# Altium PCB CPLD-V.PcbDoc (part 1 of 2)
Units mm, origin at the board's own origin, x right, y up, seen from the top; angles counter-clockwise.
Board outline 69.85 x 107.95 mm, 4 copper layers (Top Layer, Layer 1, Layer 2, Bottom Layer), stack 1.803 mm thick; 157 components, 164 nets, 714 pads, 232 vias.
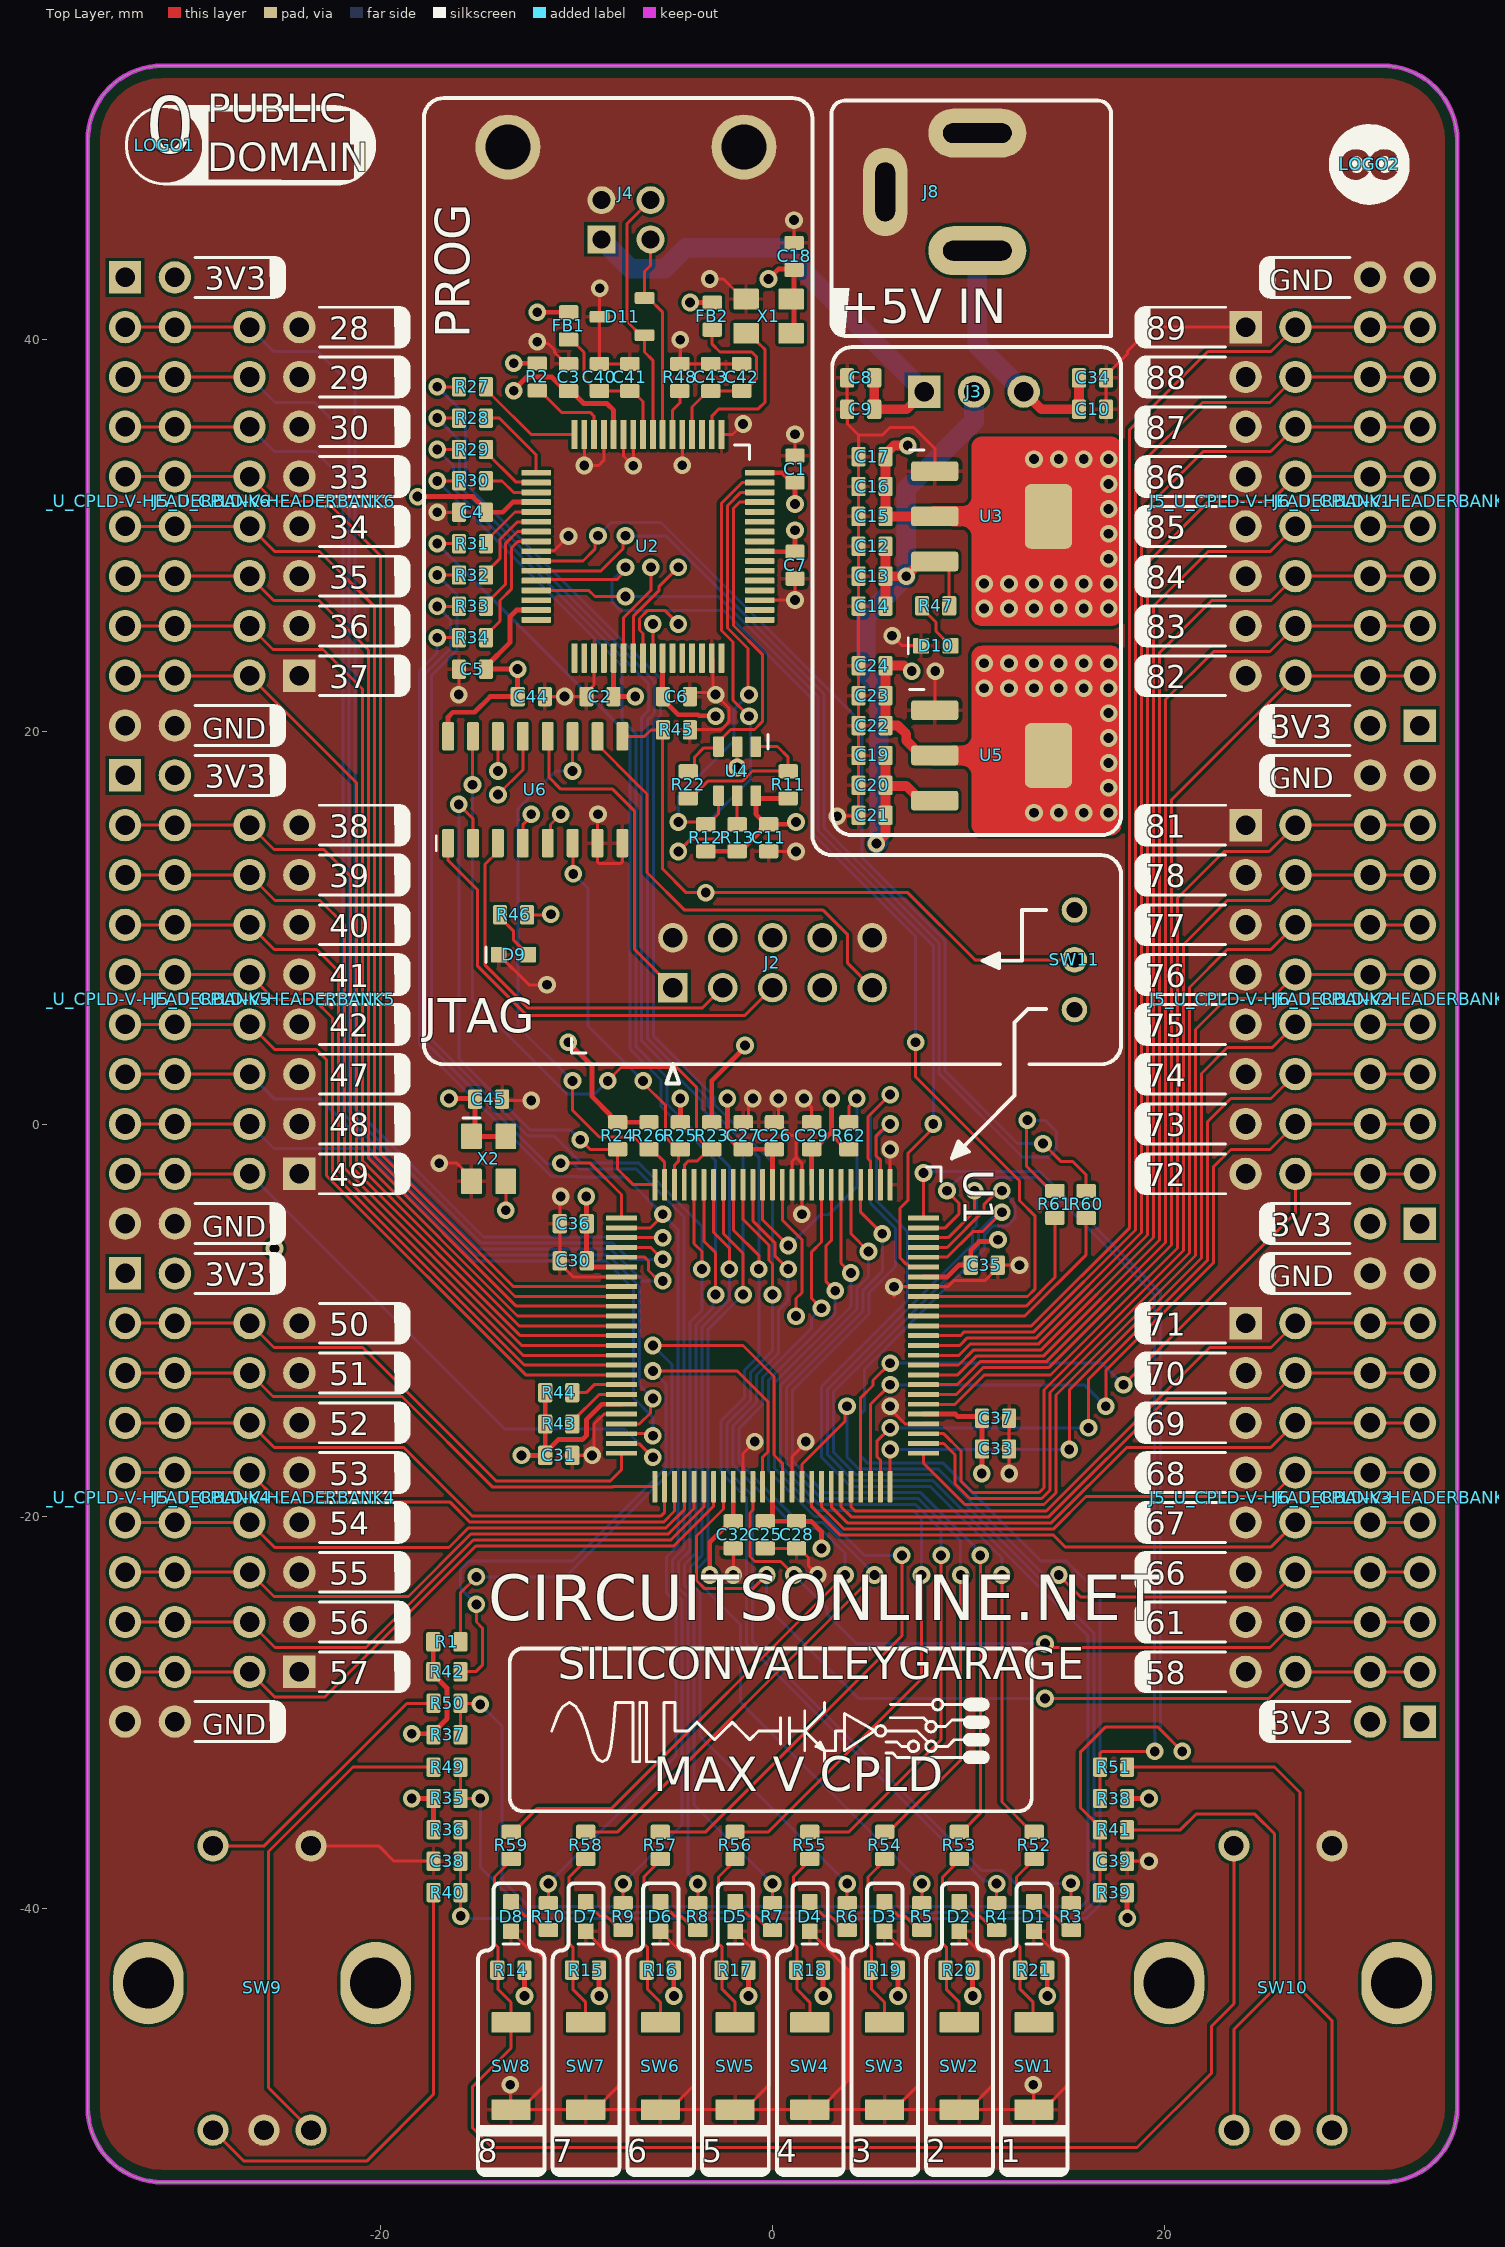
[diagram p0: Top Layer view]
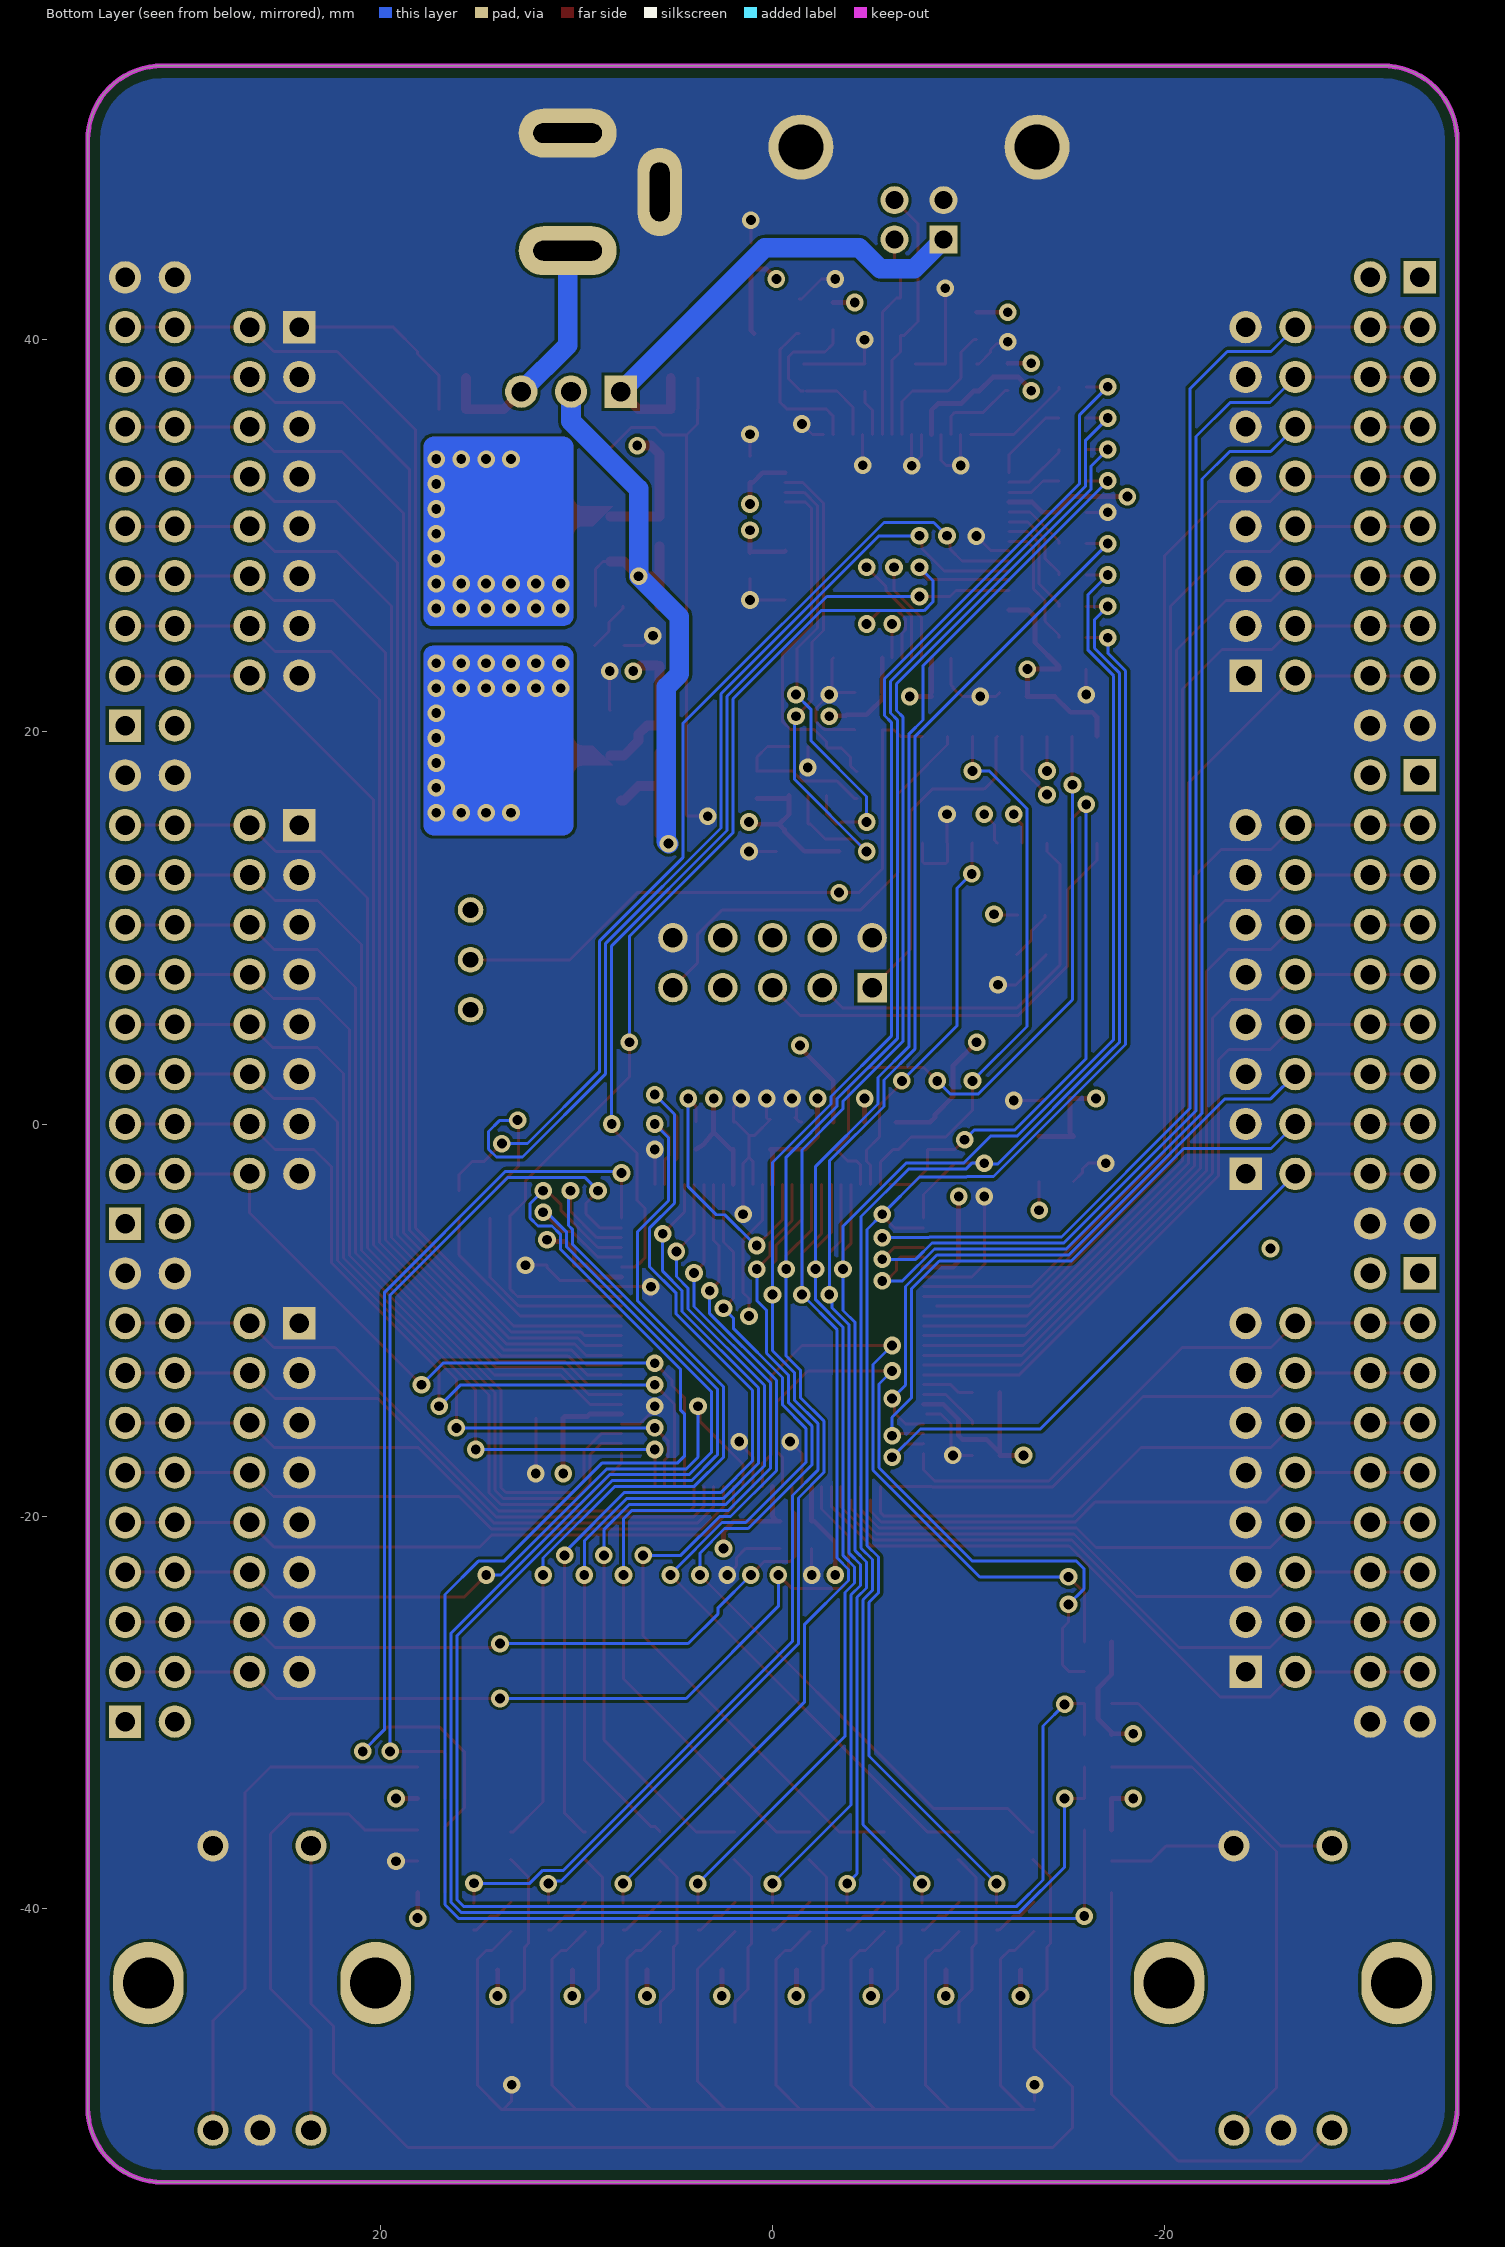
[diagram p1: Bottom Layer view, seen from below]
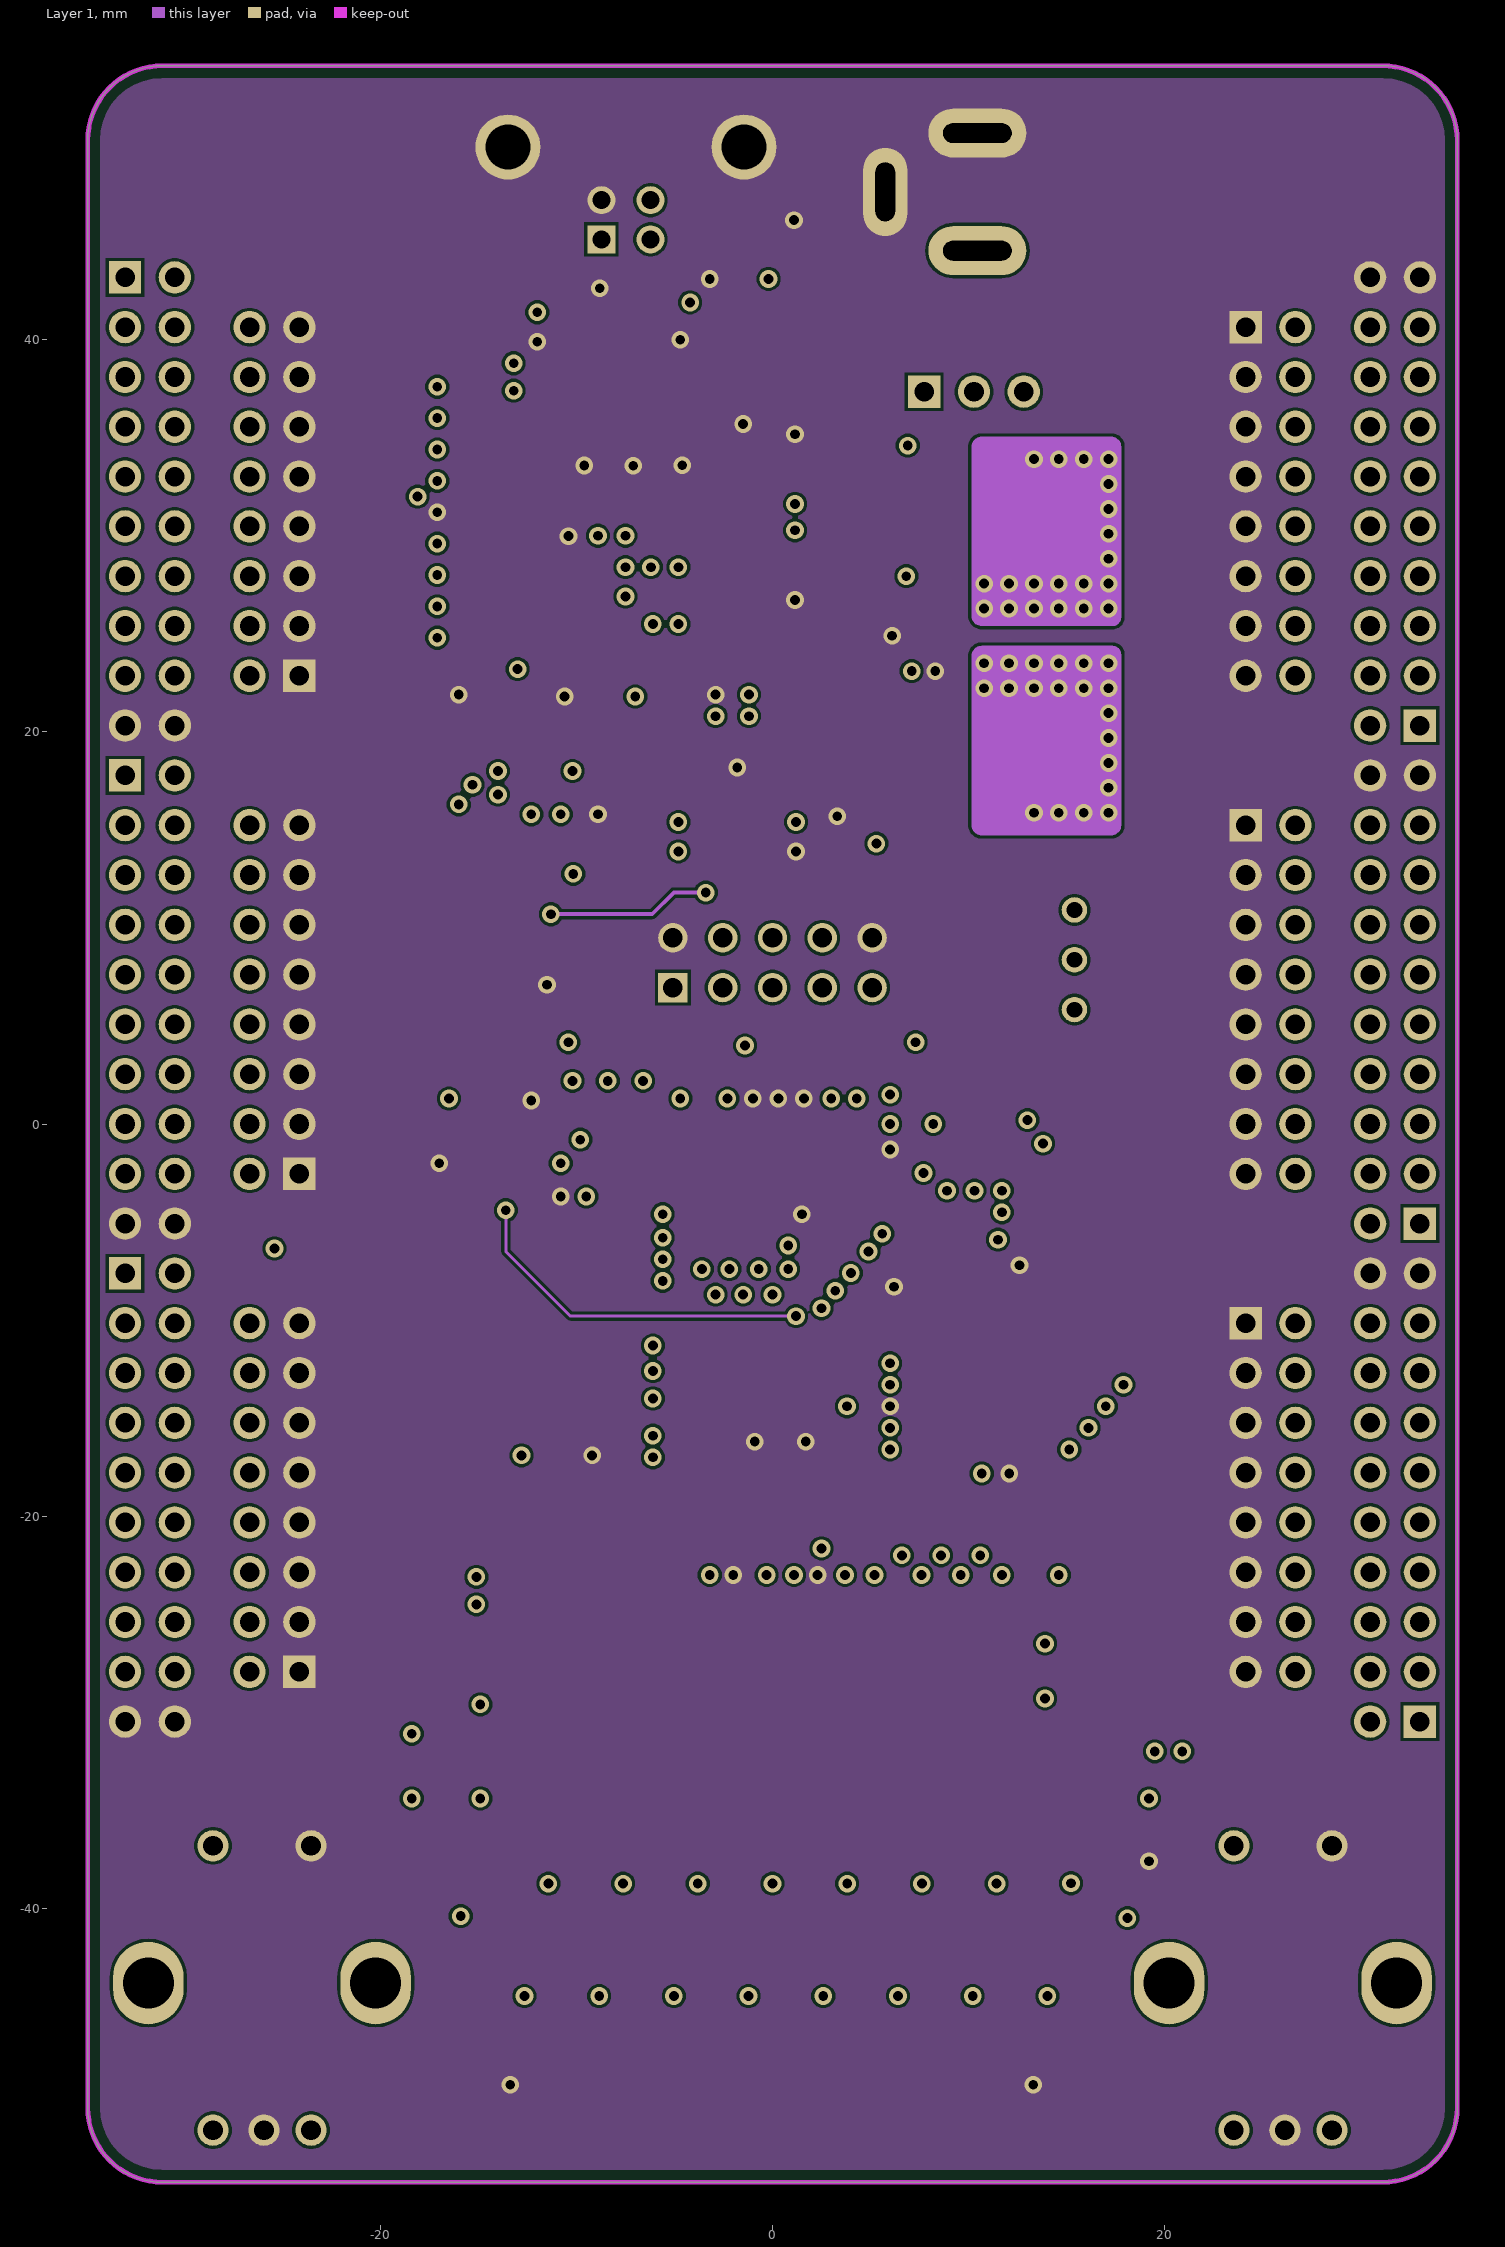
[diagram p2: Layer 1]
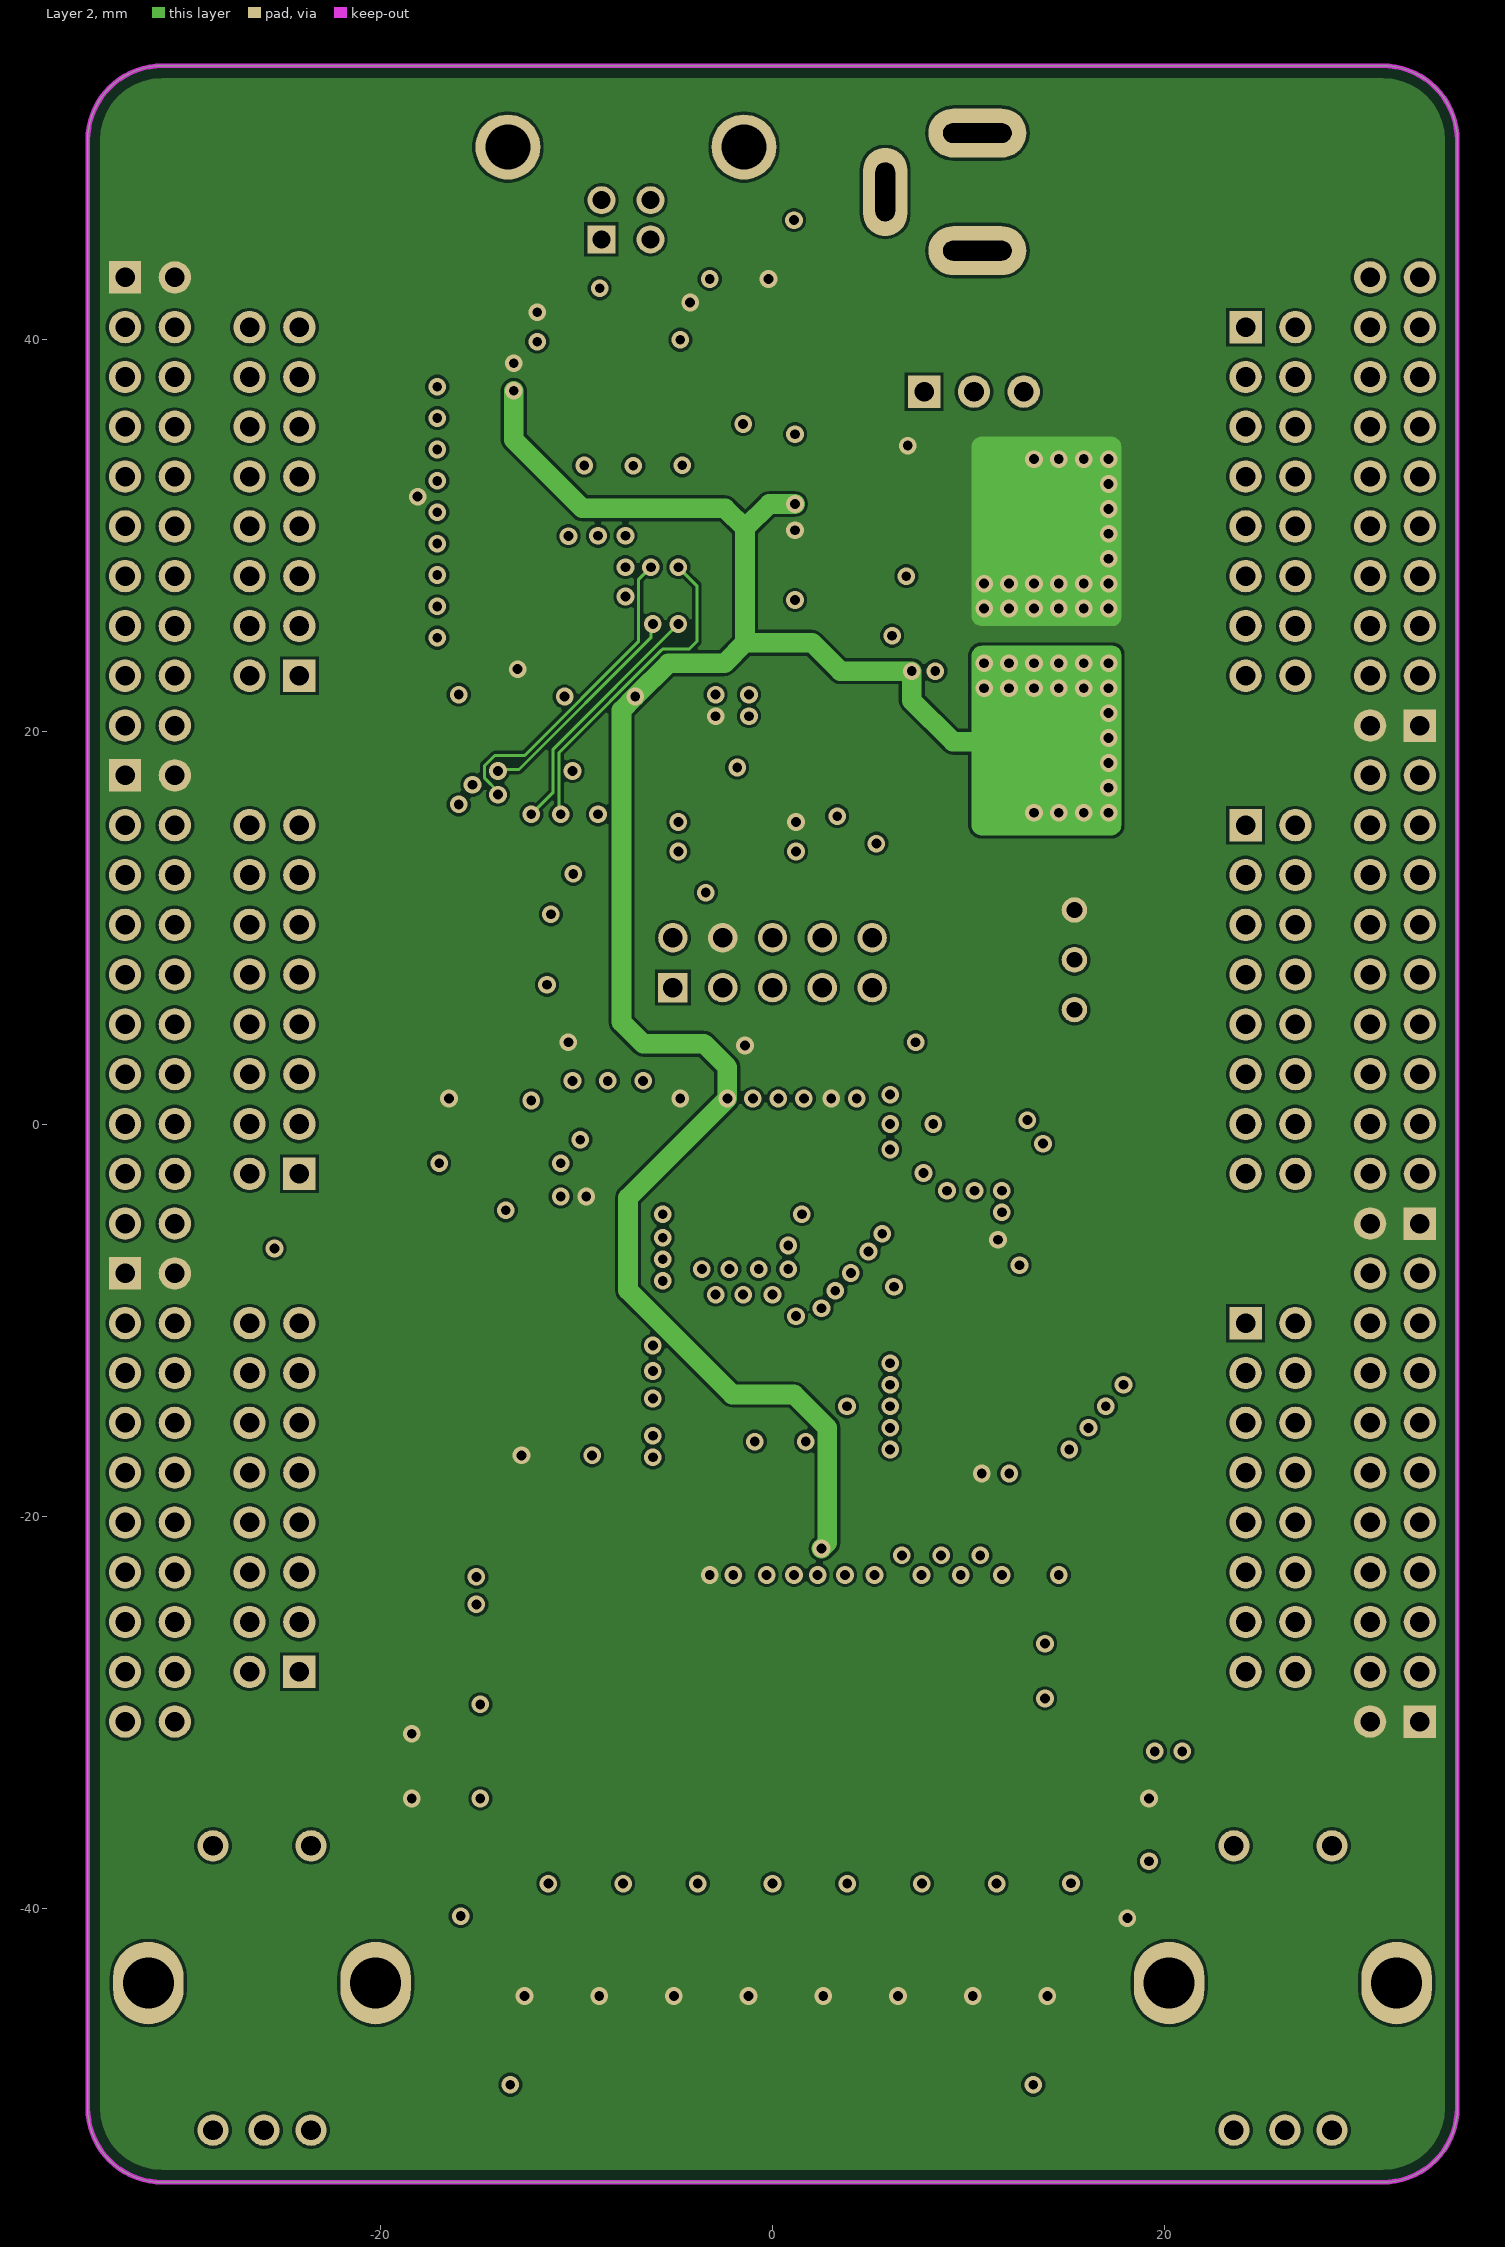
[diagram p3: Layer 2]
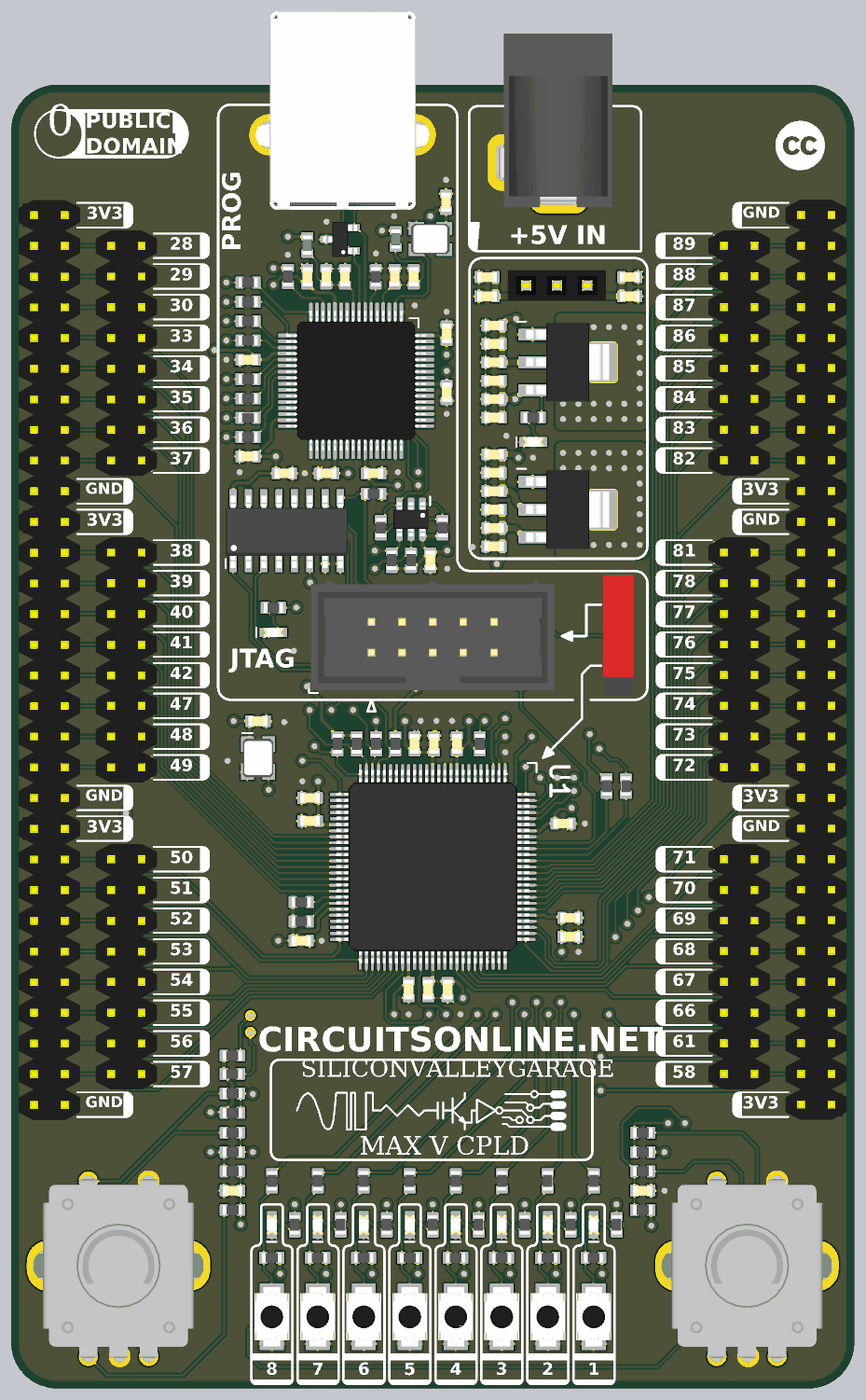
[diagram p5: 3D render of the assembled board from above, using the file's embedded part models]

## Layer stack, top to bottom
Top Solder: solder mask 0.0102, Solder Resist, Dk 3.5
Top Layer: signal copper 0.0356
Dielectric 2: prepreg 0.0711, PP-006, Dk 4.1
Layer 1: signal copper 0.035
Dielectric 1: dielectric 1.52, FR-4, Dk 4.8
Layer 2: signal copper 0.035
Dielectric 3: prepreg 0.0711, PP-006, Dk 4.1
Bottom Layer: signal copper 0.0356
Bottom Solder: solder mask 0.0102, Solder Resist, Dk 3.5

## Board outline
-34.925,-50.165 ccw(c-31.115,-50.165) -31.115,-53.975 31.115,-53.975 ccw(c31.115,-50.165) 34.925,-50.165 34.925,50.165 ccw(c31.115,50.165) 31.115,53.975 -31.115,53.975 ccw(c-31.115,50.165) -34.925,50.165

## Design rules (kind name [scope] priority, off if disabled: settings)
BoardOutlineClearance [All] p1 off: gap=0.5 ignorepadtopadclearanceinfootprint=FALSE
Clearance Clearance_1 [InPolygon vs IsKeepOut] p1: gap=0.5 ignorepadtopadclearanceinfootprint=FALSE
Clearance [All] p2: gap=0.152 ignorepadtopadclearanceinfootprint=FALSE
HoleSize [All] p1: absolutevalues=TRUE maxlimit=10 minlimit=0.025 maxpercent=80.000 minpercent=20.000
MinimumSolderMaskSliver [All] p1: minsoldermaskwidth=0.098
PolygonConnect [All] p1: thpad.connectstyle=Direct thpad.reliefconductorwidth=0.254 thpad.reliefentries=4 thpad.polygonreliefangle="90 Angle" thpad.airgapwidth=0.254 smdpad.connectstyle=Relief smdpad.reliefconductorwidth=0.2 smdpad.reliefentries=4 smdpad.polygonreliefangle="90 Angle" smdpad.airgapwidth=0.2 via.connectstyle=Direct via.reliefconductorwidth=0.254 via.reliefentries=4 via.polygonreliefangle="90 Angle" via.airgapwidth=0.254
RoomDefinition U_CPLD-V-HEADERBANK6 [InComponentClass('U_CPLD-V-HEADERBANK6')] p1: confinementstyle=ConfineIn formatcopy=TRUE lockcomponents=FALSE outline -266.061,-132.842 -215.261,-132.842 -215.261,-107.442 -266.061,-107.442
RoomDefinition U_CPLD-V-HEADERBANK5 [InComponentClass('U_CPLD-V-HEADERBANK5')] p2: confinementstyle=ConfineIn formatcopy=TRUE lockcomponents=FALSE outline -266.061,-132.842 -215.261,-132.842 -215.261,-107.442 -266.061,-107.442
RoomDefinition U_CPLD-V-HEADERBANK4 [InComponentClass('U_CPLD-V-HEADERBANK4')] p3: confinementstyle=ConfineIn formatcopy=TRUE lockcomponents=FALSE outline -266.061,-132.842 -215.261,-132.842 -215.261,-107.442 -266.061,-107.442
RoomDefinition U_CPLD-V-HEADERBANK3 [InComponentClass('U_CPLD-V-HEADERBANK3')] p4: confinementstyle=ConfineIn formatcopy=TRUE lockcomponents=FALSE outline -266.061,-132.842 -215.261,-132.842 -215.261,-107.442 -266.061,-107.442
RoomDefinition U_CPLD-V-HEADERBANK2 [InComponentClass('U_CPLD-V-HEADERBANK2')] p5: confinementstyle=ConfineIn formatcopy=TRUE lockcomponents=FALSE outline -266.061,-132.842 -215.261,-132.842 -215.261,-107.442 -266.061,-107.442
RoomDefinition U_CPLD-V-HEADERBANK1 [InComponentClass('U_CPLD-V-HEADERBANK1')] p6: confinementstyle=ConfineIn formatcopy=TRUE lockcomponents=FALSE outline -266.061,-132.842 -215.261,-132.842 -215.261,-107.442 -266.061,-107.442
RoutingVias [All] p1: holewidth=0.5 width=0.9 viastyle="Through Hole" minholewidth=0.25 minwidth=0.45 maxholewidth=0.6 maxwidth=1
SilkToSilkClearance [All] p1 off: silktosilkclearance=0.15
SilkToSolderMaskClearance [IsPad] p1: minsilkscreentomaskgap=0.05 clearancetoexposedcopper=TRUE
SolderMaskExpansion [All] p1: expansion=0.102 istentingtop=FALSE
SupplyNets "Schematic Supply Nets_5" [InNet('P1V8D')] p1: voltage=0.000
SupplyNets "Schematic Supply Nets_2" [InNet('P3V3D')] p2: voltage=0.000
SupplyNets "Schematic Supply Nets" [InNet('GND')] p3: voltage=0.000
Width [All] p1: maxlimit=2.54 minlimit=0.152 preferedwidth=0.203
26 further rules are at their usual default settings.

## Classes and differential pairs
channel class CPLD-V-HEADERBANK: U_CPLD-V-HEADERBANK1 U_CPLD-V-HEADERBANK2 U_CPLD-V-HEADERBANK3 U_CPLD-V-HEADERBANK4 U_CPLD-V-HEADERBANK5 U_CPLD-V-HEADERBANK6
component class U_CPLD-V-HEADERBANK6: J5_U_CPLD-V-HEADERBANK6 J6_U_CPLD-V-HEADERBANK6
component class U_CPLD-V-HEADERBANK5: J5_U_CPLD-V-HEADERBANK5 J6_U_CPLD-V-HEADERBANK5
component class U_CPLD-V-HEADERBANK4: J5_U_CPLD-V-HEADERBANK4 J6_U_CPLD-V-HEADERBANK4
component class U_CPLD-V-HEADERBANK3: J5_U_CPLD-V-HEADERBANK3 J6_U_CPLD-V-HEADERBANK3
component class U_CPLD-V-HEADERBANK2: J5_U_CPLD-V-HEADERBANK2 J6_U_CPLD-V-HEADERBANK2
component class U_CPLD-V-HEADERBANK1: J5_U_CPLD-V-HEADERBANK1 J6_U_CPLD-V-HEADERBANK1
component class "CPLD-V MAIN": C1 C2 C3 C4 C5 C6 C7 C8 C9 C10 C11 C12 C13 C14 C15 C16 C17 C18 C19 C20 C21 C22 C23 C24 C25 C26 C27 C28 C29 C30 C31 C32 C33 C34 C35 C36 C37 C38 C39 C40 C41 C42 C43 C44 C45 D1 D2 D3 D4 D5 D6 D7 D8 D9 D10 D11 FB1 FB2 J2 J3 J4 J8 LOGO1 LOGO2 R1 R2 R3 R4 R5 R6 R7 R8 R9 R10 R11 R12 R13 R14 R15 R16 R17 R18 R19 R20 R21 R22 R23 R24 R25 R26 R27 R28 R29 R30 R31 R32 R33 R34 R35 R36 R37 R38 R39 R40 R41 R42 R43 R44 R45 R46 R47 R48 R49 R50 R51 R52 R53 R54 R55 R56 R57 R58 R59 R60 R61 R62 SW1 SW2 SW3 SW4 SW5 SW6 SW7 SW8 SW9 SW10 SW11 U1 U2 U3 U4 U5 U6 X1 X2

## Components (designator, comment, footprint, x,y, rotation, side; value= is the part's Value field where it differs from the comment)
C1 "CAP0603" CAPC0603 1.15,33.4 r90 top
C2 "CAP0603" CAPC0603 -8.8,21.8 r180 top
C3 "CAP0603" CAPC0603 -10.4,38.075 r90 top
C4 "CAP0603" CAPC0603 -15.3,31.2 r180 top
C5 "CAP0603" CAPC0603 -15.3,23.2 r180 top
C6 "CAP0603" CAPC0603 -4.9,21.8 r0 top
C7 "CAP0603" CAPC0603 1.15,28.5 r270 top
C8 "CAP0603" CAPC0603 4.5,38.05 r180 top
C9 "CAP0603" CAPC0603 4.5,36.45 r180 top
C10 "CAP0603" CAPC0603 16.325,36.45 r0 top
C11 "CAP0603" CAPC0603 -0.2,14.6 r270 top
C12 "CAP0603" CAPC0603 5.08,29.464 r180 top
C13 "CAP0603" CAPC0603 5.08,27.94 r180 top
C14 "CAP0603" CAPC0603 5.08,26.416 r180 top
C15 "CAP0603" CAPC0603 5.08,30.988 r180 top
C16 "CAP0603" CAPC0603 5.08,32.512 r180 top
C17 "CAP0603" CAPC0603 5.08,34.036 r180 top
C18 "CAP0603" CAPC0603 1.1,44.25 r90 top
C19 "CAP0603" CAPC0603 5.08,18.796 r180 top
C20 "CAP0603" CAPC0603 5.08,17.272 r180 top
C21 "CAP0603" CAPC0603 5.08,15.748 r180 top
C22 "CAP0603" CAPC0603 5.08,20.32 r180 top
C23 "CAP0603" CAPC0603 5.08,21.844 r180 top
C24 "CAP0603" CAPC0603 5.08,23.368 r180 top
C25 "CAP0603" CAPC0603 -0.375,-20.95 r270 top
C26 "CAP0603" CAPC0603 0.1,-0.6 r90 top
C27 "CAP0603" CAPC0603 -1.5,-0.6 r90 top
C28 "CAP0603" CAPC0603 1.225,-20.95 r270 top
C29 "CAP0603" CAPC0603 2,-0.6 r90 top
C30 "CAP0603" CAPC0603 -10.16,-6.985 r180 top
C31 "CAP0603" CAPC0603 -10.9,-16.9 r0 top
C32 "CAP0603" CAPC0603 -2,-20.95 r270 top
C33 "CAP0603" CAPC0603 11.375,-16.575 r0 top
C34 "CAP0603" CAPC0603 16.325,38.05 r0 top
C35 "CAP0603" CAPC0603 10.8,-7.2 r0 top
C36 "CAP0603" CAPC0603 -10.16,-5.08 r180 top
C37 "CAP0603" CAPC0603 11.375,-15 r0 top
C38 "CAP0603" CAPC0603 -16.6,-37.6 r180 top
C39 "CAP0603" CAPC0603 17.4,-37.601 r0 top
C40 "CAP0603" CAPC0603 -8.825,38.075 r90 top
C41 "CAP0603" CAPC0603 -7.275,38.075 r90 top
C42 "CAP0603" CAPC0603 -1.575,38.075 r90 top
C43 "CAP0603" CAPC0603 -3.15,38.075 r90 top
C44 "CAP0603" CAPC0603 -12.3,21.8 r0 top
C45 "CAP0603" CAPC0603 -14.478,1.27 r0 top
D1 "KT-0603W" LED-0603-GREEN 13.335,-40.425 r90 top
D2 "KT-0603W" LED-0603-GREEN 9.525,-40.425 r90 top
D3 "KT-0603W" LED-0603-GREEN 5.715,-40.425 r90 top
D4 "KT-0603W" LED-0603-GREEN 1.905,-40.425 r90 top
D5 "KT-0603W" LED-0603-GREEN -1.905,-40.425 r90 top
D6 "KT-0603W" LED-0603-GREEN -5.715,-40.425 r90 top
D7 "KT-0603W" LED-0603-GREEN -9.525,-40.425 r90 top
D8 "KT-0603W" LED-0603-GREEN -13.335,-40.425 r90 top
D9 "KT-0603W" LED-0603-GREEN -13.208,8.636 r0 top
D10 "KT-0603W" LED-0603-GREEN 8.325,24.393 r0 top
D11 "PESD2USB5" SOT23 -7.675,41.175 r180 top
FB1 "FB0603" FB0603 -10.4,40.7 r90 top value=600Z
FB2 "FB0603" FB0603 -3.075,41.2 r90 top value=600Z
J2 "ALTERA" "CONNECTOR GENERIC-BOXHEADER-2X5" 0,8.225 r90 top
J3 "BOXHEADER-2X4" HEADER-GENERIC-MALE-1X3 10.275,37.35 r0 top
J4 "CONN-CUI-UJ2-BH-BL1-TH" CONN-CUI-UJ2-BH-BL1-TH -8.173,47.942 r180 top
J5_U_CPLD-V-HEADERBANK1 "BOXHEADER-3X2" CONNECTOR-GENERIC-PINHEADER-2X8 25.388,31.757 r270 top (schematic designator J5)
J5_U_CPLD-V-HEADERBANK2 "BOXHEADER-3X2" CONNECTOR-GENERIC-PINHEADER-2X8 25.388,6.357 r270 top (schematic designator J5)
J5_U_CPLD-V-HEADERBANK3 "BOXHEADER-3X2" CONNECTOR-GENERIC-PINHEADER-2X8 25.388,-19.043 r270 top (schematic designator J5)
J5_U_CPLD-V-HEADERBANK4 "BOXHEADER-3X2" CONNECTOR-GENERIC-PINHEADER-2X8 -25.388,-19.057 r90 top (schematic designator J5)
J5_U_CPLD-V-HEADERBANK5 "BOXHEADER-3X2" CONNECTOR-GENERIC-PINHEADER-2X8 -25.388,6.343 r90 top (schematic designator J5)
J5_U_CPLD-V-HEADERBANK6 "BOXHEADER-3X2" CONNECTOR-GENERIC-PINHEADER-2X8 -25.388,31.743 r90 top (schematic designator J5)
J6_U_CPLD-V-HEADERBANK1 "BOXHEADER-3X2" CONNECTOR-GENERIC-PINHEADER-2X10 31.766,31.762 r90 top (schematic designator J6)
J6_U_CPLD-V-HEADERBANK2 "BOXHEADER-3X2" CONNECTOR-GENERIC-PINHEADER-2X10 31.766,6.362 r90 top (schematic designator J6)
J6_U_CPLD-V-HEADERBANK3 "BOXHEADER-3X2" CONNECTOR-GENERIC-PINHEADER-2X10 31.766,-19.038 r90 top (schematic designator J6)
J6_U_CPLD-V-HEADERBANK4 "BOXHEADER-3X2" CONNECTOR-GENERIC-PINHEADER-2X10 -31.766,-19.062 r270 top (schematic designator J6)
J6_U_CPLD-V-HEADERBANK5 "BOXHEADER-3X2" CONNECTOR-GENERIC-PINHEADER-2X10 -31.766,6.338 r270 top (schematic designator J6)
J6_U_CPLD-V-HEADERBANK6 "BOXHEADER-3X2" CONNECTOR-GENERIC-PINHEADER-2X10 -31.766,31.738 r270 top (schematic designator J6)
J8 "PJ002B" CONN-CUI-PJ-002B 10.45,50.54 r180 top
LOGO1 "LOGO-LICENSE-CC0-PUBLIC" LOGO-LICENSE-CC0-PUBLIC -30.988,49.911 r0 top
LOGO2 "LOGO-LICENSE-CC" LOGO-LICENSE-CC 30.461,48.94 r0 top
R1 "RESC0603" RESC0603 -16.61,-26.41 r180 top value=10K
R2 "RESC0603" RESC0603 -12,38.1 r270 top value=1K
R3 "RESC0603" RESC0603 15.24,-40.425 r90 top value=4K7
R4 "RESC0603" RESC0603 11.43,-40.425 r90 top value=4K7
R5 "RESC0603" RESC0603 7.62,-40.425 r90 top value=4K7
R6 "RESC0603" RESC0603 3.81,-40.425 r90 top value=4K7
R7 "RESC0603" RESC0603 0,-40.425 r90 top value=4K7
R8 "RESC0603" RESC0603 -3.81,-40.425 r90 top value=4K7
R9 "RESC0603" RESC0603 -7.62,-40.425 r90 top value=4K7
R10 "RESC0603" RESC0603 -11.43,-40.425 r90 top value=4K7
R11 "RESC0603" RESC0603 0.8,17.3 r90 top value=10K
R12 "RESC0603" RESC0603 -3.4,14.6 r90 top value=10K
R13 "RESC0603" RESC0603 -1.8,14.6 r90 top value=10K
R14 "RESC0603" RESC0603 -13.345,-43.15 r180 top value=10K
R15 "RESC0603" RESC0603 -9.535,-43.15 r180 top value=10K
R16 "RESC0603" RESC0603 -5.725,-43.15 r180 top value=10K
R17 "RESC0603" RESC0603 -1.915,-43.15 r180 top value=10K
R18 "RESC0603" RESC0603 1.895,-43.15 r180 top value=10K
R19 "RESC0603" RESC0603 5.705,-43.15 r180 top value=10K
R20 "RESC0603" RESC0603 9.515,-43.15 r180 top value=10K
R21 "RESC0603" RESC0603 13.325,-43.15 r180 top value=10K
R22 "RESC0603" RESC0603 -4.3,17.3 r90 top value=2K2
R23 "RESC0603" RESC0603 -3.1,-0.6 r270 top value=10K
R24 "RESC0603" RESC0603 -7.9,-0.6 r270 top value=10K
R25 "RESC0603" RESC0603 -4.7,-0.6 r270 top value=10K
R26 "RESC0603" RESC0603 -6.3,-0.6 r270 top value=10K
R27 "RESC0603" RESC0603 -15.3,37.6 r180 top value=470R
R28 "RESC0603" RESC0603 -15.3,36 r180 top value=470R
R29 "RESC0603" RESC0603 -15.3,34.4 r180 top value=470R
R30 "RESC0603" RESC0603 -15.3,32.8 r180 top value=470R
R31 "RESC0603" RESC0603 -15.3,29.6 r180 top value=470R
R32 "RESC0603" RESC0603 -15.3,28 r180 top value=470R
R33 "RESC0603" RESC0603 -15.3,26.4 r180 top value=470R
R34 "RESC0603" RESC0603 -15.3,24.8 r180 top value=470R
R35 "RESC0603" RESC0603 -16.6,-34.4 r0 top value=10K
R36 "RESC0603" RESC0603 -16.6,-36 r0 top value=10K
R37 "RESC0603" RESC0603 -16.6,-31.15 r0 top value=10K
R38 "RESC0603" RESC0603 17.4,-34.401 r180 top value=10K
R39 "RESC0603" RESC0603 17.4,-39.201 r180 top value=10K
R40 "RESC0603" RESC0603 -16.6,-39.2 r0 top value=470R
R41 "RESC0603" RESC0603 17.4,-36.001 r180 top value=470R
R42 "RESC0603" RESC0603 -16.61,-27.934 r180 top value=10K
R43 "RESC0603" RESC0603 -10.9,-15.3 r180 top value=10K
R44 "RESC0603" RESC0603 -10.9,-13.7 r180 top value=10K
R45 "RESC0603" RESC0603 -4.9,20.1 r0 top value=10K
R46 "RESC0603" RESC0603 -13.208,10.668 r0 top value=4K7
R47 "RESC0603" RESC0603 8.325,26.425 r0 top value=4K7
R48 "RESC0603" RESC0603 -4.725,38.075 r90 top value=12K
R49 "RESC0603" RESC0603 -16.6,-32.8 r0 top value=470R
R50 "RESC0603" RESC0603 -16.6,-29.55 r0 top value=470R
R51 "RESC0603" RESC0603 17.4,-32.8 r180 top value=470R
R52 "RESC0603" RESC0603 13.35,-36.788 r90 top value=470R
R53 "RESC0603" RESC0603 9.525,-36.788 r90 top value=470R
R54 "RESC0603" RESC0603 5.725,-36.788 r90 top value=470R
R55 "RESC0603" RESC0603 1.9,-36.788 r90 top value=470R
R56 "RESC0603" RESC0603 -1.912,-36.788 r90 top value=470R
R57 "RESC0603" RESC0603 -5.725,-36.788 r90 top value=470R
R58 "RESC0603" RESC0603 -9.525,-36.788 r90 top value=470R
R59 "RESC0603" RESC0603 -13.325,-36.788 r90 top value=470R
R60 "RESC0603" RESC0603 16,-4.1 r270 top value=470R
R61 "RESC0603" RESC0603 14.4,-4.1 r270 top value=470R
R62 "RESC0603" RESC0603 3.9,-0.6 r270 top value=10K
SW1 "SWITCH-XUNPU-TS-1088-AR02016" SWITCH-XUNPU-TS-1088-AR02016 13.335,-48.045 r90 top
SW2 "SWITCH-XUNPU-TS-1088-AR02016" SWITCH-XUNPU-TS-1088-AR02016 9.525,-48.045 r90 top
SW3 "SWITCH-XUNPU-TS-1088-AR02016" SWITCH-XUNPU-TS-1088-AR02016 5.715,-48.045 r90 top
SW4 "SWITCH-XUNPU-TS-1088-AR02016" SWITCH-XUNPU-TS-1088-AR02016 1.905,-48.045 r90 top
SW5 "SWITCH-XUNPU-TS-1088-AR02016" SWITCH-XUNPU-TS-1088-AR02016 -1.905,-48.045 r270 top
SW6 "SWITCH-XUNPU-TS-1088-AR02016" SWITCH-XUNPU-TS-1088-AR02016 -5.715,-48.045 r90 top
SW7 "SWITCH-XUNPU-TS-1088-AR02016" SWITCH-XUNPU-TS-1088-AR02016 -9.525,-48.045 r90 top
SW8 "SWITCH-XUNPU-TS-1088-AR02016" SWITCH-XUNPU-TS-1088-AR02016 -13.335,-48.045 r90 top
SW9 "PEC12R-XX" SWITCH-BOURNS-PEC12R-4120F-S0012 -26.035,-43.815 r0 top
SW10 "PEC12R-XX" SWITCH-BOURNS-PEC12R-4120F-S0012 26.035,-43.815 r0 top
SW11 "SWITCH-WURTH-450301014042" SWITCH-WURTH-450301014042 15.4,8.375 r270 top
U1 "IC-ALTERA-5M240-TQFP100" QFP50P1600X1600X160-100N 0,-10.795 r270 top
U2 "FT2232H" QFP50P1000X1000X100-64N -6.35,29.464 r270 top
U3 "NCP1117-3V3" SOT223-4N 11.176,30.988 r0 top
U4 "93LC56BT-I/OT" SOT23-6 -1.8,18 r270 top
U5 "NCP1117-1V8" SOT223-4N 11.176,18.796 r0 top
U6 "IC-ONSEMI-NLV14551B" SO127P600-16N -12.1,17.05 r90 top
X1 "XOSC" XTAL-ABRACON-ABM8-272-T3 -0.2,41.2 r270 top
X2 "XOSC" XOSC3225 -14.478,-1.778 r0 top

## Footprints (in the part's own frame and the unit in brackets; to place one, negate y for a bottom-side part, rotate by r counter-clockwise, add the part's x,y. Pads: shape width x height; smd on the part's side, far side on the other; paste and mask are expansions set on the pad)
CAPC0603 [mm] "CAPACITOR, CHIP 0603 (1608) 0.5MM THICK"
  rrect25% 0.72x0.99 smd paste+0 mask+0.075: 1(-0.69,0) 2(0.69,0)
  body extent -0.81,-0.41 0.81,0.41, height 0.51
CONN-CUI-PJ-002B [mm] "CONN,BARREL JACK"
  oval 5x2.5 hole 1 slot 3.5 at 0 deg: 1(0,6) 2(0,0)
  oval 2.25x4.5 hole 1 slot 3 at 90 deg: 3(4.7,3)
  body extent -4.45,-7.68 4.96,6.72, height 11.01
CONN-CUI-UJ2-BH-BL1-TH [mm] "CONN-CUI-UJ2-BH-BL1-TH"
  rect 1.428x1.428 hole 0.92 mask+0.05: 1(0.55,2.825)
  round 1.428 hole 0.92 mask+0.05: 2(-1.95,2.825) 3(-1.95,0.825) 4(0.55,0.825)
  round 3.316 hole 2.3 mask+0.05: SH1(-6.72,-1.885) SH2(5.32,-1.885)
  body extent -8.22,-12.13 6.78,4.32, height 10.3
"CONNECTOR GENERIC-BOXHEADER-2X5" [mm] "CONNECTOR GENERIC-BOXHEADER-2X5"
  rect 1.5x1.5 hole 1 mask+0.075: 1(-1.27,5.08)
  round 1.5 hole 1 mask+0.075: 2(1.27,5.08) 3(-1.27,2.54) 4(1.27,2.54) 5(-1.27,0) 6(1.27,0) 7(-1.27,-2.54) 8(1.27,-2.54) 9(-1.27,-5.08) 10(1.27,-5.08)
  silkscreen extent -4.6,9.51 -3.85,10.26, body extent -4.39,-10.1 4.7,10.1, height 9.11
CONNECTOR-GENERIC-PINHEADER-2X8 [mm] "CONNECTOR GENERIC-PINHEADER-2X8"
  rect 1.65x1.65 hole 1 mask+0.1: 1(-8.883,-1.258)
  round 1.65 hole 1 mask+0.1: 2(-8.883,1.282) 3(-6.343,-1.258) 4(-6.343,1.282) 5(-3.803,-1.258) 6(-3.803,1.282) 7(-1.263,-1.258) 8(-1.263,1.282) 9(1.277,-1.258) 10(1.277,1.282) 11(3.817,-1.258) 12(3.817,1.282) 13(6.357,-1.258) 14(6.357,1.282) 15(8.897,-1.258) 16(8.897,1.282)
  body extent -10.16,-2.54 10.16,2.54, height 9.26
CONNECTOR-GENERIC-PINHEADER-2X10 [mm] "CONNECTOR GENERIC-PINHEADER-2X10"
  rect 1.65x1.65 hole 1 mask+0.1: 1(-11.442,-1.254)
  round 1.65 hole 1 mask+0.1: 2(-11.442,1.286) 3(-8.902,-1.254) 4(-8.902,1.286) 5(-6.362,-1.254) 6(-6.362,1.286) 7(-3.822,-1.254) 8(-3.822,1.286) 9(-1.282,-1.254) 10(-1.282,1.286) 11(1.258,-1.254) 12(1.258,1.286) 13(3.798,-1.254) 14(3.798,1.286) 15(6.338,-1.254) 16(6.338,1.286) 17(8.878,-1.254) 18(8.878,1.286) 19(11.418,-1.254) 20(11.418,1.286)
  body extent -12.7,-2.54 12.7,2.54, height 9.26
FB0603 [mm] "FERRITE BEAD 0603 (1608)"
  rrect25% 0.72x0.99 smd mask+0.075: 1(-0.69,0) 2(0.7,0)
  body extent -0.8,-0.4 0.8,0.4, height 0.95
HEADER-GENERIC-MALE-1X3 [mm] "HEADER-GENERIC-MALE-1X3"
  rect 1.65x1.65 hole 1: 1(-2.54,0)
  round 1.65 hole 1: 2(0,0) 3(2.54,0)
  body extent -4.06,-1.27 4.06,1.27, height 8.51
LED-0603-GREEN [mm] "LED,0603,LITEON,LTST-C193TGKT-5A"
  rrect12% 0.8x0.8 smd paste+0 mask+0.05: 1(-0.75,0) 2(0.75,0)
  silkscreen extent -1.4,-0.4 -1.4,0.4, body extent -0.8,-0.4 0.8,0.4, height 0.66
LOGO-LICENSE-CC [mm]
  silkscreen extent -2.08,-2.05 2.03,2.05
LOGO-LICENSE-CC0-PUBLIC [mm]
  silkscreen extent -1.97,-1.98 10.7,1.97
QFP50P1000X1000X100-64N [mm]
  rrect25% 1.5x0.3 smd paste+0 mask+0.05: 1(-5.7,3.75) 2(-5.7,3.25) 3(-5.7,2.75) 4(-5.7,2.25) 5(-5.7,1.75) 6(-5.7,1.25) 7(-5.7,0.75) 8(-5.7,0.25) 9(-5.7,-0.25) 10(-5.7,-0.75) 11(-5.7,-1.25) 12(-5.7,-1.75) 13(-5.7,-2.25) 14(-5.7,-2.75) 15(-5.7,-3.25) 16(-5.7,-3.75) 33(5.7,-3.75) 34(5.7,-3.25) 35(5.7,-2.75) 36(5.7,-2.25) 37(5.7,-1.75) 38(5.7,-1.25) 39(5.7,-0.75) 40(5.7,-0.25) 41(5.7,0.25) 42(5.7,0.75) 43(5.7,1.25) 44(5.7,1.75) 45(5.7,2.25) 46(5.7,2.75) 47(5.7,3.25) 48(5.7,3.75)
  rrect25% 0.3x1.5 smd paste+0 mask+0.05: 17(-3.75,-5.7) 18(-3.25,-5.7) 19(-2.75,-5.7) 20(-2.25,-5.7) 21(-1.75,-5.7) 22(-1.25,-5.7) 23(-0.75,-5.7) 24(-0.25,-5.7) 25(0.25,-5.7) 26(0.75,-5.7) 27(1.25,-5.7) 28(1.75,-5.7) 29(2.25,-5.7) 30(2.75,-5.7) 31(3.25,-5.7) 32(3.75,-5.7) 49(3.75,5.7) 50(3.25,5.7) 51(2.75,5.7) 52(2.25,5.7) 53(1.75,5.7) 54(1.25,5.7) 55(0.75,5.7) 56(0.25,5.7) 57(-0.25,5.7) 58(-0.75,5.7) 59(-1.25,5.7) 60(-1.75,5.7) 61(-2.25,5.7) 62(-2.75,5.7) 63(-3.25,5.7) 64(-3.75,5.7)
  silkscreen extent -5.18,4.43 -4.43,5.18, body extent -5.79,-5.79 5.79,5.79, height 1
QFP50P1600X1600X160-100N [mm] "QFP50P1600X1600X160 100N"
  rrect25% 1.6x0.249 smd mask+0.075: 1(-7.7,6) 2(-7.7,5.5) 3(-7.7,5) 4(-7.7,4.5) 5(-7.7,4) 6(-7.7,3.5) 7(-7.7,3) 8(-7.7,2.5) 9(-7.7,2) 10(-7.7,1.5) 11(-7.7,1) 12(-7.7,0.5) 13(-7.7,0) 14(-7.7,-0.5) 15(-7.7,-1) 16(-7.7,-1.5) 17(-7.7,-2) 18(-7.7,-2.5) 19(-7.7,-3) 20(-7.7,-3.5) 21(-7.7,-4) 22(-7.7,-4.5) 23(-7.7,-5) 24(-7.7,-5.5) 25(-7.7,-6) 51(7.7,-6) 52(7.7,-5.5) 53(7.7,-5) 54(7.7,-4.5) 55(7.7,-4) 56(7.7,-3.5) 57(7.7,-3) 58(7.7,-2.5) 59(7.7,-2) 60(7.7,-1.5) 61(7.7,-1) 62(7.7,-0.5) 63(7.7,0) 64(7.7,0.5) 65(7.7,1) 66(7.7,1.5) 67(7.7,2) 68(7.7,2.5) 69(7.7,3) 70(7.7,3.5) 71(7.7,4) 72(7.7,4.5) 73(7.7,5) 74(7.7,5.5) 75(7.7,6)
  rrect25% 0.249x1.6 smd mask+0.075: 26(-6,-7.7) 27(-5.5,-7.7) 28(-5,-7.7) 29(-4.5,-7.7) 30(-4,-7.7) 31(-3.5,-7.7) 32(-3,-7.7) 33(-2.5,-7.7) 34(-2,-7.7) 35(-1.5,-7.7) 36(-1,-7.7) 37(-0.5,-7.7) 38(0,-7.7) 39(0.5,-7.7) 40(1,-7.7) 41(1.5,-7.7) 42(2,-7.7) 43(2.5,-7.7) 44(3,-7.7) 45(3.5,-7.7) 46(4,-7.7) 47(4.5,-7.7) 48(5,-7.7) 49(5.5,-7.7) 50(6,-7.7) 76(6,7.7) 77(5.5,7.7) 78(5,7.7) 79(4.5,7.7) 80(4,7.7) 81(3.5,7.7) 82(3,7.7) 83(2.5,7.7) 84(2,7.7) 85(1.5,7.7) 86(1,7.7) 87(0.5,7.7) 88(0,7.7) 89(-0.5,7.7) 90(-1,7.7) 91(-1.5,7.7) 92(-2,7.7) 93(-2.5,7.7) 94(-3,7.7) 95(-3.5,7.7) 96(-4,7.7) 97(-4.5,7.7) 98(-5,7.7) 99(-5.5,7.7) 100(-6,7.7)
  silkscreen extent -8.6,7.85 -7.85,8.6, body extent -8.03,-8 7.97,8, height 1.6
RESC0603 [mm] "RESISTOR, CHIP 0603 (1608)"
  rrect25% 0.72x0.99 smd paste+0 mask+0.075: 1(-0.69,0) 2(0.69,0)
  body extent -0.8,-0.4 0.8,0.4, height 0.37
SO127P600-16N [mm] "SO16"
  rrect25% 1.45x0.6 smd mask+0.075: 1(-2.725,4.445) 2(-2.725,3.175) 3(-2.725,1.905) 4(-2.725,0.635) 5(-2.725,-0.635) 6(-2.725,-1.905) 7(-2.725,-3.175) 8(-2.725,-4.445) 9(2.725,-4.445) 10(2.725,-3.175) 11(2.725,-1.905) 12(2.725,-0.635) 13(2.725,0.635) 14(2.725,1.905) 15(2.725,3.175) 16(2.725,4.445)
  silkscreen extent -3.1,5.05 -2.35,5.05, body extent -3.1,-5.05 2.9,5.05, height 1.35
SOT23 [mm] "SOT23 PACKAGE, 3 PIN"
  rrect25% 1x0.6 smd paste+0 mask+0.075: 1(-1.15,0.95) 2(-1.15,-0.95) 3(1.15,0)
  body extent -1.4,-1.45 1.4,1.45, height 1.3
SOT23-6 [mm] "SOT23 PACKAGE, 6 PIN (SOT26)"
  rrect25% 1.05x0.55 smd paste+0 mask+0.05: 1(-1.25,0.95) 2(-1.25,0) 3(-1.25,-0.95) 4(1.25,-0.95) 5(1.25,0) 6(1.25,0.95)
  silkscreen extent -1.88,1.58 -1.12,1.58, body extent -1.4,-1.45 1.4,1.45, height 1.45
SOT223-4N [mm] "SOT223 SOT-223"
  rrect25% 2.4x1 smd mask+0.075: 1(-2.9,2.3) 2(-2.9,0) 3(-2.9,-2.3)
  rrect25% 2.4x3.3 smd mask+0.075: 4(2.9,0)
  silkscreen extent -4.2,3.37 -3.45,3.37, body extent -3.45,-3.23 3.44,3.27, height 1.6
SWITCH-BOURNS-PEC12R-4120F-S0012 [mm] "SWITCH,ROTATRY+CLICK,20MM AXLE"
  round 1.6 hole 1: 1(-2.5,7) 2(2.5,7) A(-2.5,-7.5) B(2.5,-7.5) C(0.1,-7.5)
  oval 3.6x4.2 hole 2.6: M1(5.8,0) M2(-5.8,0)
  body extent -7,-7.6 7,7.15, height 20.01
SWITCH-WURTH-450301014042 [mm] "SWITCH-WURTH-450301014042"
  round 1.3 hole 0.8 mask+0.05: 1(-2.54,0) 2(0,0) 3(2.54,0)
  body extent -5,-1.25 5,1.25, height 6.43
SWITCH-XUNPU-TS-1088-AR02016 [mm] "LCSC C720477"
  rrect9% 1.05x2 smd paste+0 mask+0.05: 1(-2.225,0) 2(2.225,0)
  body extent -2.45,-1.45 2.45,1.45, height 2
XOSC3225 [mm] "OSCILLATOR, CRYSTAL, 3225 PACKAGE"
  rrect9% 1.05x1.3 smd mask+0.05: 1(-0.875,1.15) 2(-0.875,-1.15) 3(0.875,-1.15) 4(0.875,1.15)
  silkscreen extent -1.3,2.07 -0.45,2.07, body extent -1.25,-1.6 1.25,1.6, height 0.7
XTAL-ABRACON-ABM8-272-T3 [mm] "ABM8-272-T3"
  rrect9% 1.05x1.3 smd mask+0.05: 1(-0.875,1.15) 2(-0.875,-1.15) 3(0.875,-1.15) 4(0.875,1.15)
  body extent -1.25,-1.6 1.25,1.6, height 0.7

## Part data
C1 C2 C3 C4 C5 C6 C7 C9 C10 C11 C14 C17 C18 C21 C24 C25 C27 C29 C30 C31 C32 C33 C35 C38 C39 C41 C43 C44 C45: library part CAPC-0603-100nF-50V-X7R, "CAPACITOR,CERAMIC,100nF,50V,X7R,0603", Capacitance=100nF, Dielectric=X7R, LCSC=C14663, Manufacturer 1=KEMET, Manufacturer Part Number 1=C0603C104K5RACTU, Package / Case=0603, Voltage=50V, MOUSER=80-C0603C104K5R
C8 C12 C13 C15 C16 C19 C20 C22 C23 C26 C28 C34 C36 C37 C40 C42: library part CAPC-0603-4u7-10V-X5R_1, "CAPACITOR,CERAMIC,4u7,16V,X5R,0603", Capacitance=4u7, Dielectric=X5R, LCSC=C19666, Manufacturer 1="Samsung Electro-Mechanics", Manufacturer Part Number 1=CL10A475KO8NNNC, Package / Case=0603, Voltage=16V
D1 D2 D3 D4 D5 D6 D7 D8 D9 D10: library part LED-0603-WHITE, "LED,SMD,WHITE,42mCd,0603", LCSC=C2290, Manufacturer 1="Hubei KENTO Elec", Manufacturer Part Number 1=KT-0603W
D11: library part TVS-NEXPERIA-PESD2USB5UX-TR, "DIODE,TVS,DUAL,NIDIRETIONAL,USB,PESD2USB5UX-TR,SOT23", LCSC=C3709087, Manufacturer 1=NEXPERIA, Manufacturer Part Number 1=PESD2USB5UX-TR, DIGIKEY=1727-PESD2USB5UX-CT-ND
FB1 FB2: library part FB0603-600Z-0R45, "FERRITE,600Z@100MHz,0R452DC,0603", LCSC=C1002, Manufacturer 1=SUNLORD, Manufacturer Part Number 1=GZ1608D601TF
J2: library part CONN-BOXHEADER-5X2-ALTERA, "CONN,BOXHEADER,2X5,ALTERA JTAG PINOUT"
J3: library part CONN-HEADER-MALE-1x3, "CONN,HEADER,1x3,2.54mm", LCSC=C429954
J4: "CONN,USB2.0,B,RA,BLUE", LCSC=C720549
J5_U_CPLD-V-HEADERBANK1 J5_U_CPLD-V-HEADERBANK2 J5_U_CPLD-V-HEADERBANK3 J5_U_CPLD-V-HEADERBANK4 J5_U_CPLD-V-HEADERBANK5 J5_U_CPLD-V-HEADERBANK6: library part CONN-HEADER-MALE-2X8, "CONN,HEADER,2X8,2.54mm", LCSC=C42431826
J6_U_CPLD-V-HEADERBANK1 J6_U_CPLD-V-HEADERBANK2 J6_U_CPLD-V-HEADERBANK3 J6_U_CPLD-V-HEADERBANK4 J6_U_CPLD-V-HEADERBANK5 J6_U_CPLD-V-HEADERBANK6: library part CONN-HEADER-MALE-2X10, "CONN,HEADER,2X10,2.54mm", LCSC=C5383109
J8: library part CONN-CUI-PJ002B, "CONN,DCPOWER,BARREL,CUI,PJ002B", LCSC=C381115, Manufacturer 1="XKB Connection", Manufacturer Part Number 1=DC-005-5A-2.5
R1 R11 R12 R13 R14 R15 R16 R17 R18 R19 R20 R21 R23 R24 R25 R26 R35 R36 R37 R38 R39 R42 R43 R44 R45 R62: library part RESC-0603-10K-1%-1/10W, "RESISTOR,10K,1%,100mW,0603 (1608)", LCSC=C25804, Manufacturer 1=YAGEO, Manufacturer Part Number 1=RC0603FR-0710KL, Power=1/10W, Tolerance=1%, MOUSER=603-RC0603FR-0710KL
R2: library part RESC-0603-1K-1%-1/10W, "RESISTOR,1K,1%,100mW,0603 (1608)", LCSC=C21190, Manufacturer 1=YAGEO, Manufacturer Part Number 1=RC0603FR-071KL, Power=1/10W, Tolerance=1%, MOUSER=603-RC0603FR-071KL
R3 R4 R5 R6 R7 R8 R9 R10 R46 R47: library part RESC-0603-4K7-1%-1/10W, "RESISTOR,4K7,1%,100mW,0603 (1608)", LCSC=C23162, Manufacturer 1=YAGEO, Manufacturer Part Number 1=RC0603FR-074K7L, Power=1/10W, Tolerance=1%, MOUSER=603-RC0603FR-074K7L
R22: library part RESC-0603-2K2-1%-1/10W, "RESISTOR,2K2,1%,100mW,0603 (1608)", LCSC=C4190, Power=1/10W, Tolerance=1%
R27 R28 R29 R30 R31 R32 R33 R34 R40 R41 R49 R50 R51 R52 R53 R54 R55 R56 R57 R58 R59 R60 R61: library part RESC-0603-470R-1%-1/10W, "RESISTOR,470R,1%,100mW,0603 (1608)", LCSC=C23179, Manufacturer 1=UNI-ROYAL, Manufacturer Part Number 1=0603WAF4700T5E, Power=1/10W, Tolerance=1%
R48: library part RESC-0603-12K-1%-1/10W, "RESISTOR,12K,1%,100mW,0603 (1608)", LCSC=C22790, Manufacturer 1=STACKPOLE, Manufacturer Part Number 1=RMCF0603FT12K0, Power=1/10W, Tolerance=1%, MOUSER=708-RMCF0603FT12K0
SW1 SW2 SW3 SW4 SW5 SW6 SW7 SW8: "SWITCH,TACT,SMD,2PIN,SMT,TOP ACTUATOR", LCSC=C720477, Manufacturer 1=XUNPU, Manufacturer Part Number 1=TS-1088-AR02016
SW9 SW10: library part SWITCH-BOURNS-PEC12R-4130F-S0012, "SWITCH,ENCODER+CLICK,12 DETENTS,30mm,BOURNS,PEC12R-4130F-S0012", LCSC=C143795, Manufacturer 1=BOURNS, Manufacturer Part Number 1=PEC12R-4130F-S0012
SW11: "SWITCH,SPDT,SLIDE,2.45MM,WURTH-450301014042", LCSC=C2985934, Manufacturer 1="SM SWITCH", Manufacturer Part Number 1=BSI-10
U1: "IC,LOGIC,CPLD,ALTERA,5M240-TQFP100", LCSC=C192889, Manufacturer 1=Intel/Altera, Manufacturer Part Number 1=5M240ZT100C5N
U2: library part IC-FTDI-FT2232H, "IC,XCVR,USB UART,DUAL,FTDI,FT2232H,QFP64", LCSC=C27882, Manufacturer 1=FTDI, Manufacturer Part Number 1=FT2232HL-REEL
U3: library part IC-ONSEMI-NCP1117-3V3, "IC,VOLTAGE REG,LIN,POSITIVE,3V3,NCP1117-33,SOT223", LCSC=C26537, Manufacturer 1=ONSEMI, Manufacturer Part Number 1=NCP1117ST33T3G
U4: library part IC-MICROCHIPIC-93LC56-SOT26, "IC,EEPROM,2KBIT,MICROWIRE,MICROCHIP,93LC56BT-I/OT", LCSC=C190271, Manufacturer 1=MICROCHIP, Manufacturer Part Number 1=93LC56BT-I/OT
U5: library part IC-ONSEMI-NCP1117-1V8, "IC,VOLTAGE REG,LIN,POSITIVE,1V8,NCP1117-18,SOT223", LCSC=C2902118, Manufacturer 1=ONSEMI, Manufacturer Part Number 1=NCP1117IST18T3G
U6: "IC,ANALOG,4PDT ANALOG SWITCH,ONSEMI,NLV14551,SO16", LCSC=C904812, Manufacturer 1=ONSEMI, Manufacturer Part Number 1=NLV14551BDR2G
X1 X2: library part XOSC-JLYE-Y322512MNCCZ, "XOSC,12MHz,3225", LCSC=C49207924, Manufacturer 1=JLYE, Manufacturer Part Number 1=Y322512MNCCZ

## Via types
v1: diameter 0.9, hole 0.5, Top Layer to Bottom Layer, tented both sides, 189 vias
v2: diameter 0.9, hole 0.5, Top Layer to Bottom Layer, 43 vias

## Nets (pads, with @x,y where several pads share a name; then routed paths per layer and width w, separated by ;. In a path a pad name is that pad's centre, name@x,y a point inside that pad or via, vN(x,y) a via of type N, cw(c..) or ccw(c..) an arc to the next point about the centre after c; other vN are vias at no path point)
D0: R27.1 U2.16 | length 5.6
  Top Layer w0.153: R27.1@-14.61,37.6 -14.61,37.465 -14.25,37.105 -12.309,35.164 U2.16@-10.1,35.164
D1: R28.1 U2.17 | length 4.2
  Top Layer w0.153: R28.1@-14.61,36 -13.926,36 -12.05,34.124 U2.17@-12.05,33.214
D2: R29.1 U2.18 | length 3.3
  Top Layer w0.153: R29.1@-14.61,34.4 -14.61,34.265 -13.1,32.755 -12.091,32.755 U2.18@-12.05,32.714
D3: R30.1 U2.19 | length 2.8
  Top Layer w0.153: R30.1@-14.61,32.8 -13.793,32.8 -13.207,32.214 U2.19@-12.05,32.214
D4: R31.1 U2.21 | length 3.3
  Top Layer w0.153: R31.1@-14.61,29.6 -14.61,29.735 -13.131,31.214 U2.21@-12.05,31.214
D5: R32.1 U2.22 | length 4.3
  Top Layer w0.153: R32.1@-14.61,28 -14.61,28.135 -13.91,28.835 -13.91,29.805 -13.001,30.714 U2.22@-12.05,30.714
D6: R33.1 U2.23 | length 5.4
  Top Layer w0.153: R33.1@-14.61,26.4 -14.61,26.535 -13.605,27.54 -13.605,29.615 -13.006,30.214 U2.23@-12.05,30.214
D7: R34.1 U2.24 | length 6.5
  Top Layer w0.153: R34.1@-14.61,24.8 -14.61,24.935 -13.9,25.645 -13.9,26.7 -13.3,27.3 -13.3,29.4 -12.986,29.714 U2.24@-12.05,29.714
GND: C1.2 C2.2 C3.2 C4.2 C5.2 C6.2 C7.2 C8.2 C9.2 C10.2 C11.2 C12.2 C13.2 C14.2 C15.2 C16.2 C17.2 C18.2 C19.2 C20.2 C21.2 C22.2 C23.2 C24.2 C25.2 C26.2 C27.2 C28.2 C29.2 C30.2 C31.2 C32.2 C33.2 C34.2 C35.2 C36.2 C37.2 C38.2 C39.2 C40.2 C41.2 C42.2 C43.2 C44.2 C45.2 D1.1 D2.1 D3.1 D4.1 D5.1 D6.1 D7.1 D8.1 D9.1 D10.1 D11.3 J2.2 J2.10 J4.4 J4.SH1 J4.SH2 J5_U_CPLD-V-HEADERBANK1.1 J5_U_CPLD-V-HEADERBANK1.3 J5_U_CPLD-V-HEADERBANK1.5 J5_U_CPLD-V-HEADERBANK1.7 J5_U_CPLD-V-HEADERBANK1.9 J5_U_CPLD-V-HEADERBANK1.11 J5_U_CPLD-V-HEADERBANK1.13 J5_U_CPLD-V-HEADERBANK1.15 J5_U_CPLD-V-HEADERBANK2.1 J5_U_CPLD-V-HEADERBANK2.3 J5_U_CPLD-V-HEADERBANK2.5 J5_U_CPLD-V-HEADERBANK2.7 J5_U_CPLD-V-HEADERBANK2.9 J5_U_CPLD-V-HEADERBANK2.11 J5_U_CPLD-V-HEADERBANK2.13 J5_U_CPLD-V-HEADERBANK2.15 J5_U_CPLD-V-HEADERBANK3.1 J5_U_CPLD-V-HEADERBANK3.3 J5_U_CPLD-V-HEADERBANK3.5 J5_U_CPLD-V-HEADERBANK3.7 J5_U_CPLD-V-HEADERBANK3.9 J5_U_CPLD-V-HEADERBANK3.11 J5_U_CPLD-V-HEADERBANK3.13 J5_U_CPLD-V-HEADERBANK3.15 J5_U_CPLD-V-HEADERBANK4.1 J5_U_CPLD-V-HEADERBANK4.3 J5_U_CPLD-V-HEADERBANK4.5 J5_U_CPLD-V-HEADERBANK4.7 J5_U_CPLD-V-HEADERBANK4.9 J5_U_CPLD-V-HEADERBANK4.11 J5_U_CPLD-V-HEADERBANK4.13 J5_U_CPLD-V-HEADERBANK4.15 J5_U_CPLD-V-HEADERBANK5.1 J5_U_CPLD-V-HEADERBANK5.3 J5_U_CPLD-V-HEADERBANK5.5 J5_U_CPLD-V-HEADERBANK5.7 J5_U_CPLD-V-HEADERBANK5.9 J5_U_CPLD-V-HEADERBANK5.11 J5_U_CPLD-V-HEADERBANK5.13 J5_U_CPLD-V-HEADERBANK5.15 J5_U_CPLD-V-HEADERBANK6.1 J5_U_CPLD-V-HEADERBANK6.3 J5_U_CPLD-V-HEADERBANK6.5 J5_U_CPLD-V-HEADERBANK6.7 J5_U_CPLD-V-HEADERBANK6.9 J5_U_CPLD-V-HEADERBANK6.11 J5_U_CPLD-V-HEADERBANK6.13 J5_U_CPLD-V-HEADERBANK6.15 J6_U_CPLD-V-HEADERBANK1.19 J6_U_CPLD-V-HEADERBANK1.20 J6_U_CPLD-V-HEADERBANK2.19 J6_U_CPLD-V-HEADERBANK2.20 J6_U_CPLD-V-HEADERBANK3.19 J6_U_CPLD-V-HEADERBANK3.20 J6_U_CPLD-V-HEADERBANK4.19 J6_U_CPLD-V-HEADERBANK4.20 J6_U_CPLD-V-HEADERBANK5.19 J6_U_CPLD-V-HEADERBANK5.20 J6_U_CPLD-V-HEADERBANK6.19 J6_U_CPLD-V-HEADERBANK6.20 J8.2 J8.3 R45.2 R48.2 SW1.1 SW2.1 SW3.1 SW4.1 SW5.2 SW6.1 SW7.1 SW8.1 SW9.2 SW9.C SW10.2 SW10.C U1.1 U1.10 U1.11 U1.32 U1.46 U1.60 U1.65 U1.79 U1.93 U2.1 U2.5 U2.10 U2.11 U2.13 U2.15 U2.25 U2.35 U2.47 U2.51 U3.1 U4.2 U5.1 U6.7 U6.8 X1.2 X2.2 | length 271.3
  Top Layer w0.153: SW9.2@-23.535,-36.815 -20.085,-36.815 -19.3,-37.6 C38.2@-17.29,-37.6 ; v1(-17.1,31.2) C4.2@-15.99,31.2 ; v1(-17,-2) -16.1,-2 -15.8,-2.3 -15.8,-2.481 X2.2@-15.353,-2.928 ; v1(-16,21.9) -15.995,21.905 -15.995,23.195 C5.2@-15.99,23.2 ; D9.1@-13.958,8.636 -12.422,7.1 v1(-11.5,7.1) ; C45.2@-13.788,1.27 -13.718,1.2 v1(-12.3,1.2) ; SW8.1@-13.37,-49.822 v1(-13.37,-49) ; SW8.1@-13.335,-50.27 SW8.1@-12.86,-50.27 ; D8.1@-13.335,-41.175 -12.36,-42.15 -12.07,-42.15 -11.62,-42.6 -11.62,-49.03 SW8.1@-12.86,-50.27 ; U2.25@-12.05,29.214 -12.027,29.237 -11.147,29.237 v1(-10.4,29.984) ; v1(-12,39.9) -11.905,39.805 -11.44,39.805 -11.118,39.483 -11.118,39.355 -10.528,38.765 C3.2@-10.4,38.765 ; C44.2@-11.585,22 -11.385,21.8 -9.69,21.8 -9.49,22 -9.432,22 -9.215,22.217 -9.215,22.275 -9.107,22.383 U2.35@-9.107,23.757 ; v1(-10.8,-3.7) -10.825,-3.725 -10.825,-6.96 C30.2@-10.85,-6.985 -10.85,-7.12 -10.175,-7.795 U1.32@-7.7,-7.795 ; C31.2@-10.21,-16.9 -9.5,-16.9 v1@-9.1,-16.5 ; U2.15@-9.6,35.164 v1(-9.6,33.584) -8.866,33.584 -8.6,33.85 U2.13@-8.6,35.164 ; D7.1@-9.525,-41.175 -8.55,-42.15 -8.26,-42.15 -7.81,-42.6 -7.81,-49.03 SW7.1@-9.05,-50.27 ; v1(-9.2,-16.9) -9.1,-16.8 -9.1,-15.3 -8.597,-14.797 U1.46@-7.867,-14.797 ; U6.7@-8.925,14.325 -8.925,13.371 -8.835,13.281 -7.745,13.281 -7.655,13.371 U6.8@-7.655,14.325 ; U6.7@-8.912,14.337 -8.912,15.788 v1(-8.9,15.8) ; v1(-8.814,42.625) -8.825,42.614 C40.2@-8.825,38.765 C41.2@-7.275,38.765 ; U2.11@-7.6,35.164 -7.6,34.075 v1(-7.1,33.575) U2.10@-7.1,35.164 ; D6.1@-5.715,-41.175 -4.74,-42.15 -4.45,-42.15 -4,-42.6 -4,-49.03 SW6.1@-5.24,-50.27 ; v1(-4.7,40) -4.7,38.79 R48.2@-4.725,38.765 C43.2@-3.15,38.765 C42.2@-1.575,38.765 ; v1(-4.6,33.6) U2.5@-4.6,35.164 ; R45.2@-4.21,20.1 -4.189,20.121 -2.619,20.121 -2.221,20.519 -2.221,21.221 v1(-2.9,21.9) ; C6.2@-4.21,22 -3.2,22 -3.026,22.173 -3.026,23.691 U2.47@-3.1,23.764 ; v1(-3.2,43.1) -2.5,43.1 -1.475,42.075 X1.2@-1.35,42.075 ; U2.1@-2.6,35.164 -2.036,35.164 v1(-1.5,35.7) ; v1(-2,-23) C32.2@-2,-21.64 ; SW5.2@-1.905,-50.27 -1.43,-50.27 -0.19,-49.03 -0.19,-42.6 -0.64,-42.15 -0.93,-42.15 D5.1@-1.905,-41.175 ; v1(-1.8,18.182) U4.2@-1.8,19.25 ; U1.60@-1.5,-18.495 -1.5,-16.8 v1(-0.9,-16.2) ; C27.2@-1.5,0.09 -1.394,0.09 -1.161,0.323 -1.222,0.323 -1.222,0.903 -1,1.125 v1(-1,1.3) ; U2.51@-0.65,26.714 -0.646,26.718 1.146,26.718 v1(1.15,26.722) C7.2@1.15,27.81 ; C25.2@-0.375,-21.64 1.36,-21.64 1.829,-22.109 1.829,-22.529 v1(2.3,-23) ; C11.2@-0.2,13.91 1.19,13.91 v1(1.2,13.9) ; v1(0.3,1.3) 0.3,0.323 0.202,0.225 0.1,0.225 0.9,-0.575 1.2,-0.575 ; U1.65@1,-18.495 1,-16.975 1.7,-16.275 v1(1.7,-16.2) ; U1.11@1,-3.095 1,-1.9 1.2,-1.7 ; C18.2@1.1,44.94 v1(1.1,46.1) ; C1.2@1.114,34.084 C1.2@1.143,34.055 ; C1.2@1.15,34.09 v1(1.15,35.178) ; v1(1.5,-4.6) U1.10@1.5,-3.095 1.498,-3.092 1.498,-1.998 1.2,-1.7 ; v1(1.6,1.3) 1.6,1.231 2,0.831 C29.2@2,0.09 1.865,0.09 1.2,-0.575 ; D4.1@1.905,-41.175 3.825,-43.095 3.825,-48.825 SW4.1@2.38,-50.27 ; v1(3.3,15.7) 4.342,15.7 C21.2@4.39,15.748 C20.2@4.39,17.272 C19.2@4.39,18.796 C22.2@4.39,20.32 C23.2@4.39,21.844 C24.2@4.39,23.368 C14.2@4.39,26.416 C13.2@4.39,27.94 C12.2@4.39,29.464 C15.2@4.39,30.988 C16.2@4.39,32.512 C17.2@4.39,34.036 4.39,35.135 ; C8.2@3.81,38.05 3.81,36.465 3.825,36.45 3.825,35.7 4.39,35.135 ; D3.1@5.715,-41.175 6.69,-42.15 6.98,-42.15 7.43,-42.6 7.43,-49.03 SW3.1@6.19,-50.27 ; v1(6,-14.4) 6,-14.54 6.765,-15.305 7.69,-15.305 U1.79@7.7,-15.295 ; U1.1@6,-3.095 v1(6,-1.3) ; v1(6.1,24.9) 6.607,24.393 D10.1@7.575,24.393 ; 6.192,-8.788 v1@6.44,-8.54 ; v1(6.2,-8.3) 6.205,-8.295 U1.93@7.7,-8.295 8.945,-8.295 9.268,-7.972 10.853,-7.972 11.49,-7.335 C35.2@11.49,-7.2 v1(12.6,-7.2) ; U5.1@8.276,21.096 8.3,21.12 v1(8.3,23.1) ; U3.1@8.276,33.288 8.276,34.452 7.201,35.527 5.991,35.527 5.6,35.135 4.39,35.135 ; D2.1@9.525,-41.175 10.5,-42.15 10.79,-42.15 11.24,-42.6 11.24,-49.03 SW2.1@10,-50.27 ; 12.043,-15.803 12.065,-15.825 ; C37.2@12.065,-15 12.065,-15.825 ; v1(12.075,-17.825) 12.065,-17.815 12.065,-15.825 ; v1(13.3,-49) 13.3,-49.822 13.748,-50.27 SW1.1@13.81,-50.27 ; D1.1@13.335,-41.175 14.31,-42.15 14.6,-42.15 15.05,-42.6 15.05,-49.03 SW1.1@13.81,-50.27 ; C10.2@17.015,36.45 C34.2@17.015,38.05 17.015,38.185 18.1,39.27 18.1,39.4 19.34,40.64 J5_U_CPLD-V-HEADERBANK1.1@24.13,40.64 ; C39.2@18.09,-37.601 19.199,-37.601 v1(19.2,-37.6) ; SW8.1@-12.86,-50.27 SW7.1@-9.05,-50.27 ; SW7.1@-9.05,-50.27 SW6.1@-5.24,-50.27 ; SW6.1@-5.24,-50.27 SW4.1@2.38,-50.27 ; 1.2,-1.7 1.2,-0.575 ; SW4.1@2.38,-50.27 SW3.1@6.19,-50.27 ; SW3.1@6.19,-50.27 SW2.1@10,-50.27 ; SW2.1@10,-50.27 SW1.1@13.335,-50.27 SW1.1@13.81,-50.27
  Layer 1 w0.153: v1@-1.8,17.9 v1(-1.8,18.182)
  other v1: -10.6,21.8
NetC8_1: C8.1 C9.1 J3.1 J4.1 | length 25.1
  Top Layer w0.5: C8.1@5.19,38.05 C9.1@5.19,36.45 6.835,36.45 J3.1@7.735,37.35
  Bottom Layer w1: J4.1@-8.723,45.117 -7.221,43.615 -5.503,43.615 -4.418,44.7 0.385,44.7 J3.1@7.735,37.35
NetC10_1: C10.1 C34.1 J3.3 J8.1 | length 13
  Top Layer w0.5: J3.3@12.815,37.35 13.715,36.45 C10.1@15.635,36.45 C34.1@15.635,38.05
  Bottom Layer w1: J8.1@10.45,44.54 10.45,39.715 J3.3@12.815,37.35
NetC12_1: C12.1 C13.1 C14.1 C19.1 C20.1 C21.1 J3.2 R47.2 U3.3 U5.3 | length 41.6
  Top Layer w0.153: C12.1@5.77,29.336 C12.1@5.77,29.509 ; U3.3@8.276,28.688 8.642,28.688 9.015,28.315 R47.2@9.015,26.425
  Top Layer w0.5: v1(5.3,14.3) 5.77,14.77 C21.1@5.77,15.748 C20.1@5.77,17.272 ; C19.1@5.77,18.931 C20.1@5.77,17.272 ; C14.1@5.77,26.416 C13.1@5.77,27.94 ; C12.1@5.77,29.464 C13.1@5.77,27.94 ; U5.3@7.725,16.496 7.576,16.496 6.826,17.246 5.796,17.246 C20.1@5.77,17.272 ; U3.3@8.276,28.688 7.576,28.688 6.828,27.94 C13.1@5.77,27.94
  Bottom Layer w1: v1(5.3,14.3) 5.41,14.41 5.41,22.298 4.75,22.958 4.75,25.864 v1(6.826,27.94) 6.826,32.393 10.275,35.842 J3.2@10.275,37.35
NetC38_1: C38.1 R36.2 R40.2 U1.97 | length 91.2
  Top Layer w0.153: R36.2@-15.91,-36 R40.2@-15.91,-39.2 -15.91,-40.39 v1(-15.9,-40.4) ; U1.97@7.7,-6.295 8.91,-6.295 10.777,-4.428 10.777,-4.123 11.5,-3.4 v1(11.7,-3.4)
  Bottom Layer w0.153: v1(-15.9,-40.4) -15.79,-40.51 16.009,-40.51 16.7,-39.819 16.7,-24 15,-22.3 13.7,-22.3 8.679,-17.279 4.831,-17.279 4.5,-16.948 4.5,-14.774 4.7,-14.574 4.7,-12.494 10.821,-6.373 10.821,-5.619 11.24,-5.2 11.96,-5.2 12.379,-4.781 12.379,-4.082 11.7,-3.404 v1(11.7,-3.4)
NetC39_1: C39.1 R39.2 R41.2 U1.100 | length 54.7
  Top Layer w0.153: U1.100@7.7,-4.795 v1(7.7,-2.5) ; R39.2@16.71,-39.201 C39.1@16.71,-37.601 R41.2@16.71,-36.001 16.71,-35.866 15.7,-34.856 15.7,-32.037 16.973,-30.764 19.664,-30.764 v1(20.9,-32)
  Bottom Layer w0.153: v1(7.7,-2.5) 7.784,-2.416 13.616,-2.416 19.8,-8.6 19.8,-30.9 v1(20.9,-32)
NetC40_1: C40.1 C41.1 FB1.1 U2.9 | length 7.6
  Top Layer w0.153: FB1.1@-10.4,40.01 -10.265,40.01 -9.612,39.357 -9.612,38.037 -8.96,37.385 C40.1@-8.825,37.385 -7.14,37.385 -6.6,36.845 U2.9@-6.6,35.164
NetC42_1: C42.1 C43.1 FB2.1 U2.4 | length 9.5
  Top Layer w0.153: U2.4@-4.1,35.164 -4.1,36.57 -3.285,37.385 C43.1@-3.15,37.385 C42.1@-1.71,37.385 ; FB2.1@-3.075,40.51 -3.075,39.775 -2.675,39.375 -1.06,39.375 -0.825,39.14 -0.825,38 -1.44,37.385 C42.1@-1.575,37.385
NetD1_2: D1.2 R3.1 | length 2.5
  Top Layer w0.153: D1.2@13.335,-39.675 14.06,-40.4 14.39,-40.4 15.105,-41.115 R3.1@15.24,-41.115
NetD2_2: D2.2 R4.1 | length 2.5
  Top Layer w0.153: D2.2@9.525,-39.675 10.25,-40.4 10.58,-40.4 11.295,-41.115 R4.1@11.43,-41.115
NetD3_2: D3.2 R5.1 | length 2.5
  Top Layer w0.153: D3.2@5.715,-39.675 6.44,-40.4 6.77,-40.4 7.485,-41.115 R5.1@7.62,-41.115
NetD4_2: D4.2 R6.1 | length 2.5
  Top Layer w0.153: D4.2@1.905,-39.675 2.63,-40.4 2.96,-40.4 3.675,-41.115 R6.1@3.81,-41.115
NetD5_2: D5.2 R7.1 | length 2.5
  Top Layer w0.153: D5.2@-1.905,-39.675 -1.18,-40.4 -0.85,-40.4 -0.135,-41.115 R7.1@0,-41.115
NetD6_2: D6.2 R8.1 | length 2.5
  Top Layer w0.153: D6.2@-5.715,-39.675 -4.99,-40.4 -4.66,-40.4 -3.945,-41.115 R8.1@-3.81,-41.115
NetD7_2: D7.2 R9.1 | length 2.5
  Top Layer w0.153: D7.2@-9.525,-39.675 -8.8,-40.4 -8.47,-40.4 -7.755,-41.115 R9.1@-7.62,-41.115
NetD8_2: D8.2 R10.1 | length 2.5
  Top Layer w0.153: D8.2@-13.335,-39.675 -12.61,-40.4 -12.28,-40.4 -11.565,-41.115 R10.1@-11.43,-41.115
NetD9_2: D9.2 R46.1 | length 2.6
  Top Layer w0.153: R46.1@-13.898,10.668 -13.898,10.533 -13.2,9.835 -13.2,9.378 D9.2@-12.458,8.636
NetD10_2: D10.2 R47.1 | length 2.6
  Top Layer w0.153: R47.1@7.635,26.425 7.635,26.29 8.335,25.59 8.335,25.133 D10.2@9.075,24.393
NetD11_1: D11.1 J4.3 U2.8 | length 13.1
  Top Layer w0.153: J4.3@-6.223,47.117 -7.425,45.915 -7.425,40.925 -6.725,40.225 D11.1@-6.525,40.225 -6.525,39.375 -6.1,38.95 U2.8@-6.1,35.164
NetD11_2: D11.2 J4.2 U2.7 | length 10.6
  Top Layer w0.153: J4.2@-6.223,45.117 -6.223,43.784 -6.525,43.482 D11.2@-6.525,42.125 -6.325,42.125 -5.6,41.4 U2.7@-5.6,35.164
NetJ2_1: J2.1 U6.12 | length 17
  Top Layer w0.153: U6.12@-11.465,19.775 -11.4,19.71 -11.4,17.679 -10.794,17.073 -8.153,17.073 -7.05,15.97 -7.05,8.925 J2.1@-5.08,6.955
NetJ2_3: J2.3 U6.3 | length 19.9
  Top Layer w0.153: U6.3@-14.005,14.325 -14.005,13.9 -14.675,13.23 -14.675,8.125 -12.478,5.928 -3.567,5.928 J2.3@-2.54,6.955
NetJ2_5: J2.5 U6.1 | length 23.6
  Top Layer w0.153: U6.1@-16.545,14.325 -16.545,13.445 -15.034,11.934 -15.034,8.045 -12.513,5.524 -1.431,5.524 J2.5@0,6.955
NetJ2_9: J2.9 U6.10 | length 22.8
  Top Layer w0.153: U6.10@-8.925,19.775 -8.925,19.35 -6.931,17.356 -6.4,16.825 -6.4,12.825 -4.478,10.903 2.584,10.903 3.835,9.652 3.835,8.2 J2.9@5.08,6.955
NetR1_1: R1.1 U1.64 | length 35.3
  Top Layer w0.152: R1.1@-15.92,-26.41 -15.92,-23.92 v2(-15.1,-23.1) ; v1(-6.1,-11.3) -1.5,-11.3 0.083,-12.883 0.083,-16.881 0.5,-17.298 U1.64@0.5,-18.495
  Bottom Layer w0.152: v2(-15.1,-23.1) -10.573,-23.1 -5.13,-17.657 -5.13,-17.419 -5.117,-17.407 -5.117,-13.593 -5.13,-13.581 -5.13,-12.27 v1(-6.1,-11.3)
NetR2_2: R2.2 U2.14 | length 4.4
  Top Layer w0.153: R2.2@-12,37.41 -11.865,37.41 -10.755,36.3 -9.3,36.3 -9.1,36.1 U2.14@-9.1,35.164
NetR11_2: R11.2 R22.1 U4.1 | length 8.3
  Top Layer w0.153: R22.1@-4.3,16.61 -4.165,16.61 -3.271,17.504 -1.519,17.504 -1.022,18 0.79,18 R11.2@0.8,17.99 0.8,18.7 0.25,19.25 U4.1@-0.85,19.25
NetR12_2: R12.2 U2.62 U4.4 | length 23.3
  Top Layer w0.153: v1(-4.8,15.4) -3.51,15.4 R12.2@-3.4,15.29 -3.265,15.29 -2.75,15.805 U4.4@-2.75,16.75 ; v1(-1.2,21.9) -1.246,21.946 -1.246,24.246 -2.295,25.295 -2.295,31.536 -1.617,32.214 U2.62@-0.65,32.214
  Bottom Layer w0.153: v1(-4.8,15.4) -4.8,16.7 -1.971,19.529 -1.971,21.129 v1(-1.2,21.9)
NetR13_2: R13.2 U2.63 U4.5 | length 27.3
  Top Layer w0.153: v1(-4.8,13.9) -4.173,14.527 -2.698,14.527 -1.935,15.29 R13.2@-1.8,15.29 U4.5@-1.8,16.75 ; v1(-1.2,20.8) -2.012,21.612 -2.012,24.581 -2.6,25.169 -2.6,31.663 -1.549,32.714 U2.63@-0.65,32.714
  Bottom Layer w0.153: v1(-4.8,13.9) -1.121,17.579 -1.121,20.721 v1(-1.2,20.8)
NetR14_2: R14.2 R59.1 SW8.2 SW10.1 | length 67
  Top Layer w0.153: R59.1@-13.28,-37.5 -14.18,-38.4 -14.18,-41.8 -13.995,-41.985 -13.995,-44.135 -13.335,-44.795 SW8.2@-13.335,-45.82 -13.335,-47.135 -15.3,-49.1 -15.3,-51.2 -14.3,-52.2 18.596,-52.2 22.4,-48.396 22.4,-46 23.535,-44.865 SW10.1@23.535,-36.815
NetR15_2: R15.2 R58.1 SW7.2 | length 9
  Top Layer w0.153: SW7.2@-9.525,-45.82 -9.525,-44.795 -10.185,-44.135 -10.185,-43.15 -10.185,-41.985 -10.37,-41.8 -10.37,-38.4 R58.1@-9.47,-37.5
NetR16_2: R16.2 R57.1 SW6.2 | length 9
  Top Layer w0.153: SW6.2@-5.715,-45.82 -5.715,-44.795 -6.375,-44.135 -6.375,-43.15 -6.375,-41.985 -6.56,-41.8 -6.56,-38.4 R57.1@-5.66,-37.5
NetR17_2: R17.2 R56.1 SW5.1 | length 9
  Top Layer w0.153: SW5.1@-1.905,-45.82 -1.905,-44.795 -2.565,-44.135 -2.565,-43.15 -2.565,-41.985 -2.75,-41.8 -2.75,-38.4 R56.1@-1.85,-37.5
NetR18_2: R18.2 R55.1 SW4.2 | length 9
  Top Layer w0.153: SW4.2@1.905,-45.82 1.905,-44.795 1.245,-44.135 1.245,-43.15 1.245,-41.985 1.06,-41.8 1.06,-38.4 R55.1@1.96,-37.5
NetR19_2: R19.2 R54.1 SW3.2 | length 9
  Top Layer w0.153: SW3.2@5.715,-45.82 5.715,-44.795 5.055,-44.135 5.055,-43.15 5.055,-41.985 4.87,-41.8 4.87,-38.4 R54.1@5.77,-37.5
NetR20_2: R20.2 R53.1 SW2.2 | length 9
  Top Layer w0.153: SW2.2@9.525,-45.82 9.525,-44.795 8.865,-44.135 8.865,-43.15 8.865,-41.985 8.68,-41.8 8.68,-38.4 R53.1@9.58,-37.5
NetR21_2: R21.2 R52.1 SW1.2 | length 9
  Top Layer w0.153: SW1.2@13.295,-45.82 13.295,-44.795 12.635,-44.135 R21.2@12.635,-43.15 12.635,-41.985 12.45,-41.8 12.45,-38.4 R52.1@13.35,-37.5
NetR22_2: R22.2 U2.61 U4.3 | length 18.2
  Top Layer w0.153: R22.2@-4.3,17.99 -4.254,17.99 -3.971,18.272 -3.971,18.716 -3.5,19.188 -2.812,19.188 U4.3@-2.75,19.25 -2.75,19.5 -2.129,20.121 -0.919,20.121 -0.521,20.519 -0.521,23.953 -1.99,25.421 -1.99,31.41 -1.686,31.714 U2.61@-0.65,31.714
NetR23_2: R23.2 U1.22 U6.15 | length 34
  Top Layer w0.153: v1(-15.3,17.3) -15.288,17.313 -15.288,19.762 U6.15@-15.275,19.775 ; v1(-8.4,2.2) -7.721,2.879 -4.888,2.879 -3.866,1.857 -3.866,-0.659 R23.2@-3.235,-1.29 ; U1.22@-4.5,-3.095 -4.5,-2.1 -4.279,-1.879 -3.823,-1.879 R23.2@-3.235,-1.29 ; R23.2@-3.1,-1.29 R23.2@-3.235,-1.29
  Bottom Layer w0.153: v1(-15.3,17.3) -15.3,6.34 -10.481,1.521 -9.079,1.521 v1(-8.4,2.2)
NetR24_2: R24.2 U1.25 U6.2 | length 28.5
  Top Layer w0.153: v2(-16,16.3) -15.275,15.575 U6.2@-15.275,14.325 ; v1(-9.8,-0.8) -9.31,-1.29 R24.2@-7.9,-1.29 -7.9,-2.3 -7.105,-3.095 U1.25@-6,-3.095
  Bottom Layer w0.153: v2(-16,16.3) -16,3.342 -12.341,-0.317 -10.283,-0.317 v1(-9.8,-0.8)
NetR25_2: R25.2 U1.23 U6.6 | length 19.7
  Top Layer w0.153: U6.6@-10.195,14.325 -10.178,14.307 -10.178,12.772 v1(-10.16,12.755) ; v1(-6.6,2.2) -6.6,2.096 -5.45,0.945 -5.45,-0.675 -4.8,-1.325 -4.8,-1.9 -5,-2.1 U1.23@-5,-3.095
  Bottom Layer w0.153: v1(-10.16,12.755) -10.14,12.755 -9.4,12.015 -9.4,5 v1(-6.6,2.2)
NetR26_2: R26.2 U1.24 U6.11 | length 28.8
  Top Layer w0.153: v1(-10.2,2.2) -10.2,0.7 -8.835,-0.665 -7.06,-0.665 -6.435,-1.29 R26.2@-6.3,-1.29 -6.165,-1.29 -5.5,-1.955 U1.24@-5.5,-3.095 ; v1(-10.2,18) -10.198,18.002 -10.198,19.772 U6.11@-10.195,19.775
  Bottom Layer w0.153: v1(-10.2,2.2) -12.979,4.979 -12.979,16.081 -11.06,18 v1(-10.2,18)
NetR35_2: R35.2 R49.2 U1.96 | length 90.3
  Top Layer w0.153: R49.2@-15.91,-32.8 R35.2@-15.91,-34.4 v1(-14.9,-34.4) ; U1.96@7.7,-6.795 8.905,-6.795 10.207,-5.493 10.707,-5.493 v1(11.7,-4.5)
  Bottom Layer w0.153: v1(-14.9,-34.4) -14.9,-37.891 -12.586,-40.205 15.883,-40.205 16.395,-39.693 16.395,-25.973 8.311,-17.889 4.262,-17.889 3.1,-16.726 3.1,-13.663 10.516,-6.246 10.516,-5.493 11.509,-4.5 v1(11.7,-4.5)
NetR37_2: R37.2 R50.2 U1.98 | length 94.1
  Top Layer w0.153: R37.2@-15.91,-31.15 R50.2@-15.91,-29.55 -14.95,-29.55 v1(-14.9,-29.6) ; U1.98@7.7,-5.795 8.96,-5.795 10.3,-4.455 v1(10.3,-3.4)
  Bottom Layer w0.153: v1(-14.9,-29.6) -13.8,-30.7 -13.8,-38.56 -12.46,-39.9 15.756,-39.9 16.09,-39.566 16.09,-26.099 8.184,-18.194 4.136,-18.194 2.916,-16.974 2.795,-16.853 2.795,-13.536 10.211,-6.12 10.211,-5.366 10.4,-5.178 10.4,-3.5 v1(10.3,-3.4)
NetR38_2: R38.2 R51.2 U1.99 | length 45.3
  Top Layer w0.153: U1.99@7.7,-5.295 8.806,-5.295 9.5,-4.601 9.5,-4.034 8.9,-3.434 v1(8.9,-3.4) ; R38.2@16.71,-34.401 R51.2@16.71,-32.8 16.71,-32.09 16.8,-32 v1(19.5,-32)
  Bottom Layer w0.153: v1(8.9,-3.4) 9.579,-2.721 13.49,-2.721 19.495,-8.726 19.495,-31.026 19.5,-31.031 v1(19.5,-32)